# Altium PCB GateDrive.PcbDoc (part 1 of 3)
Units mm, origin at the board's own origin, x right, y up, seen from the top; angles counter-clockwise.
Board outline 204.3 x 103 mm, 4 copper layers (Top Layer, Internal Plane 1, Internal Plane 2, Bottom Layer), stack 0.778 mm thick; 236 components, 133 nets, 651 pads, 165 vias.
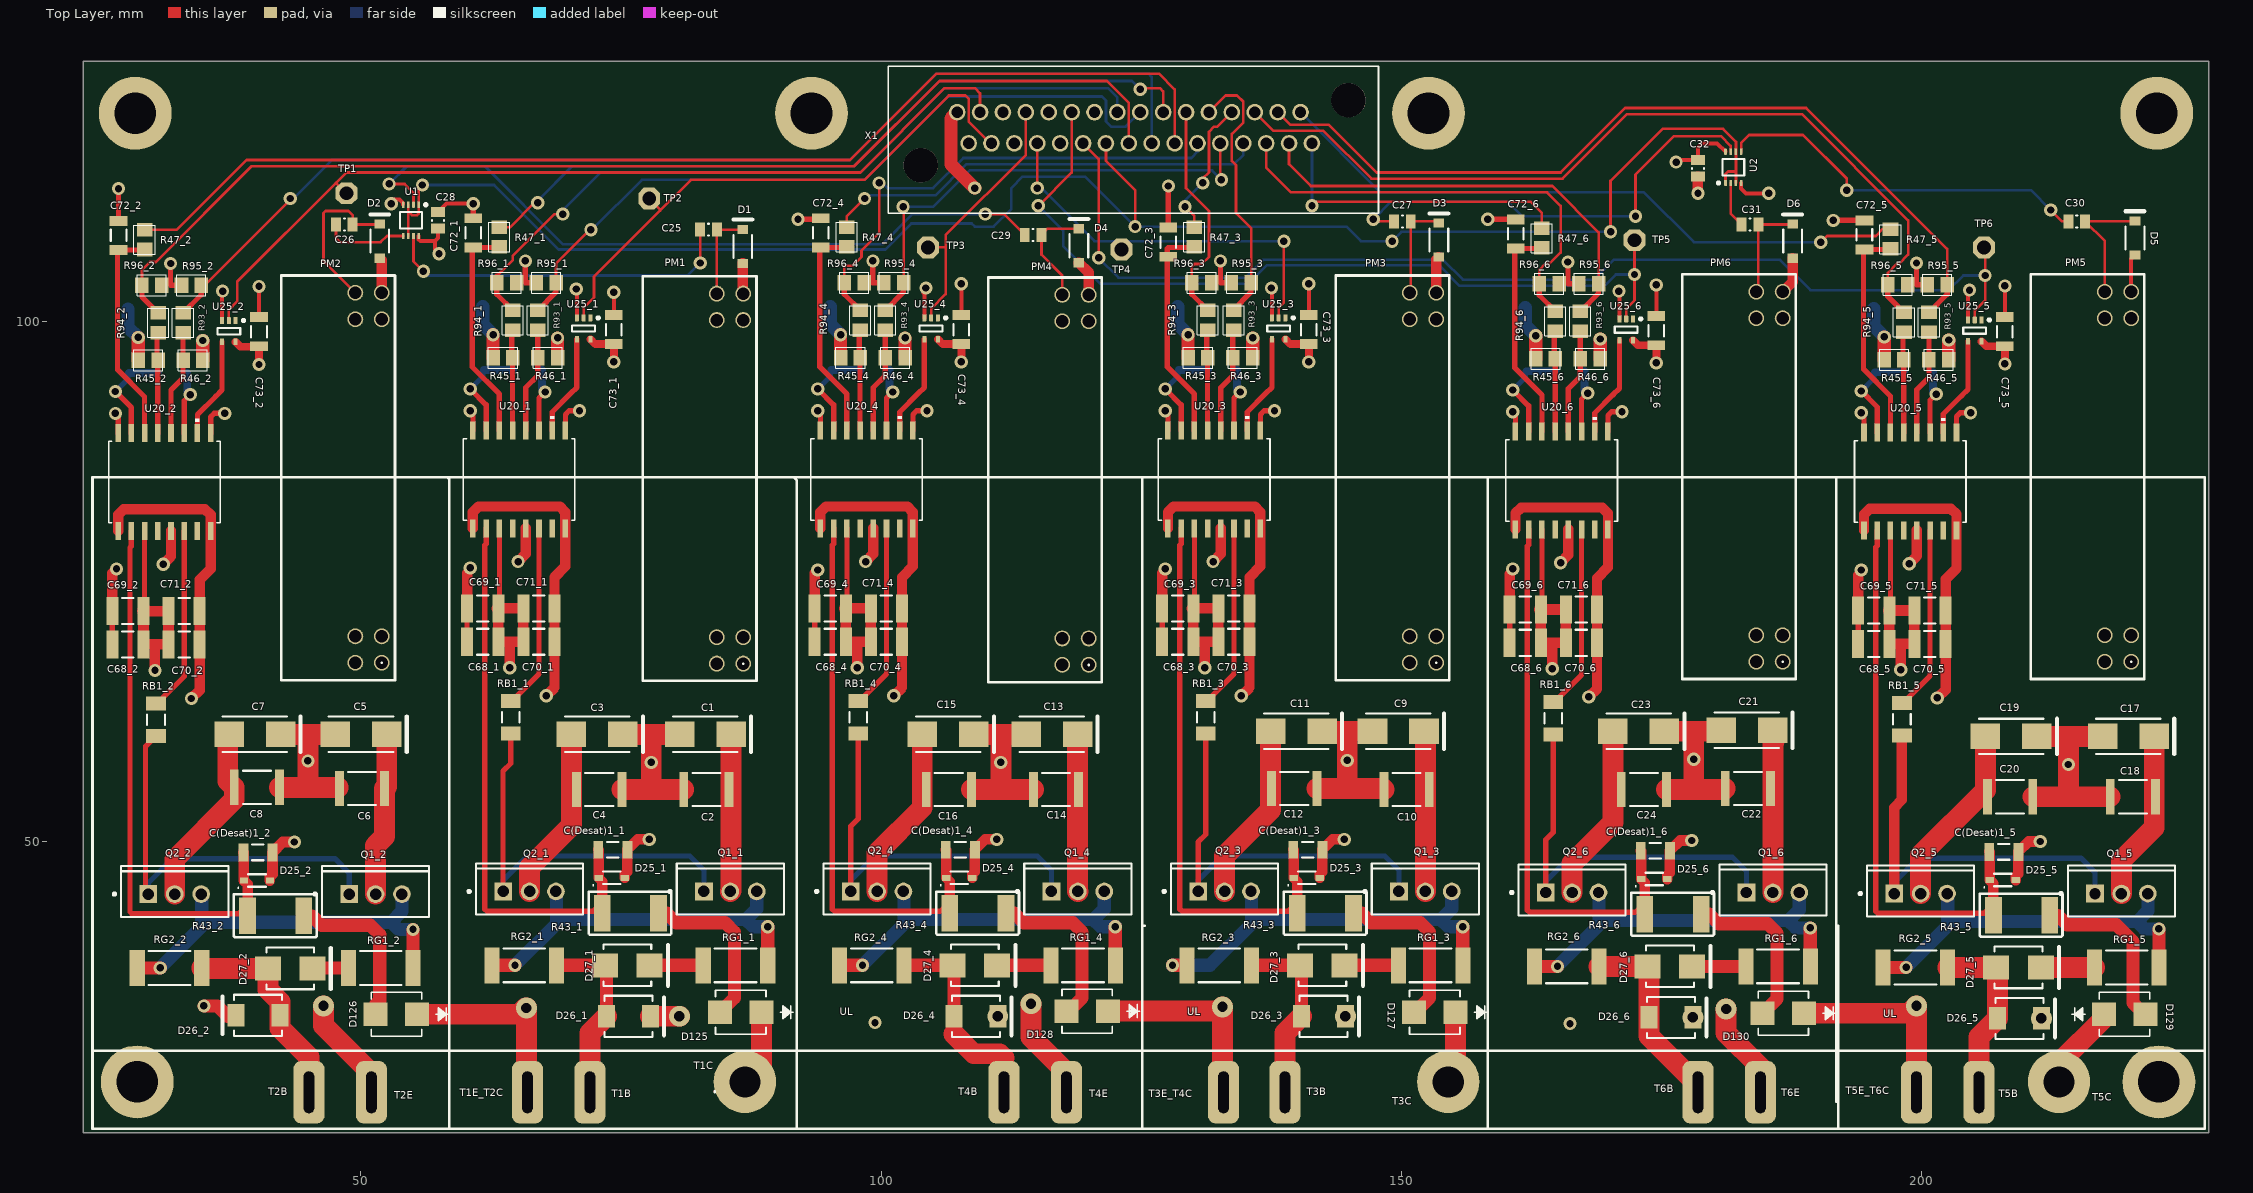
[diagram p0: Top Layer view]
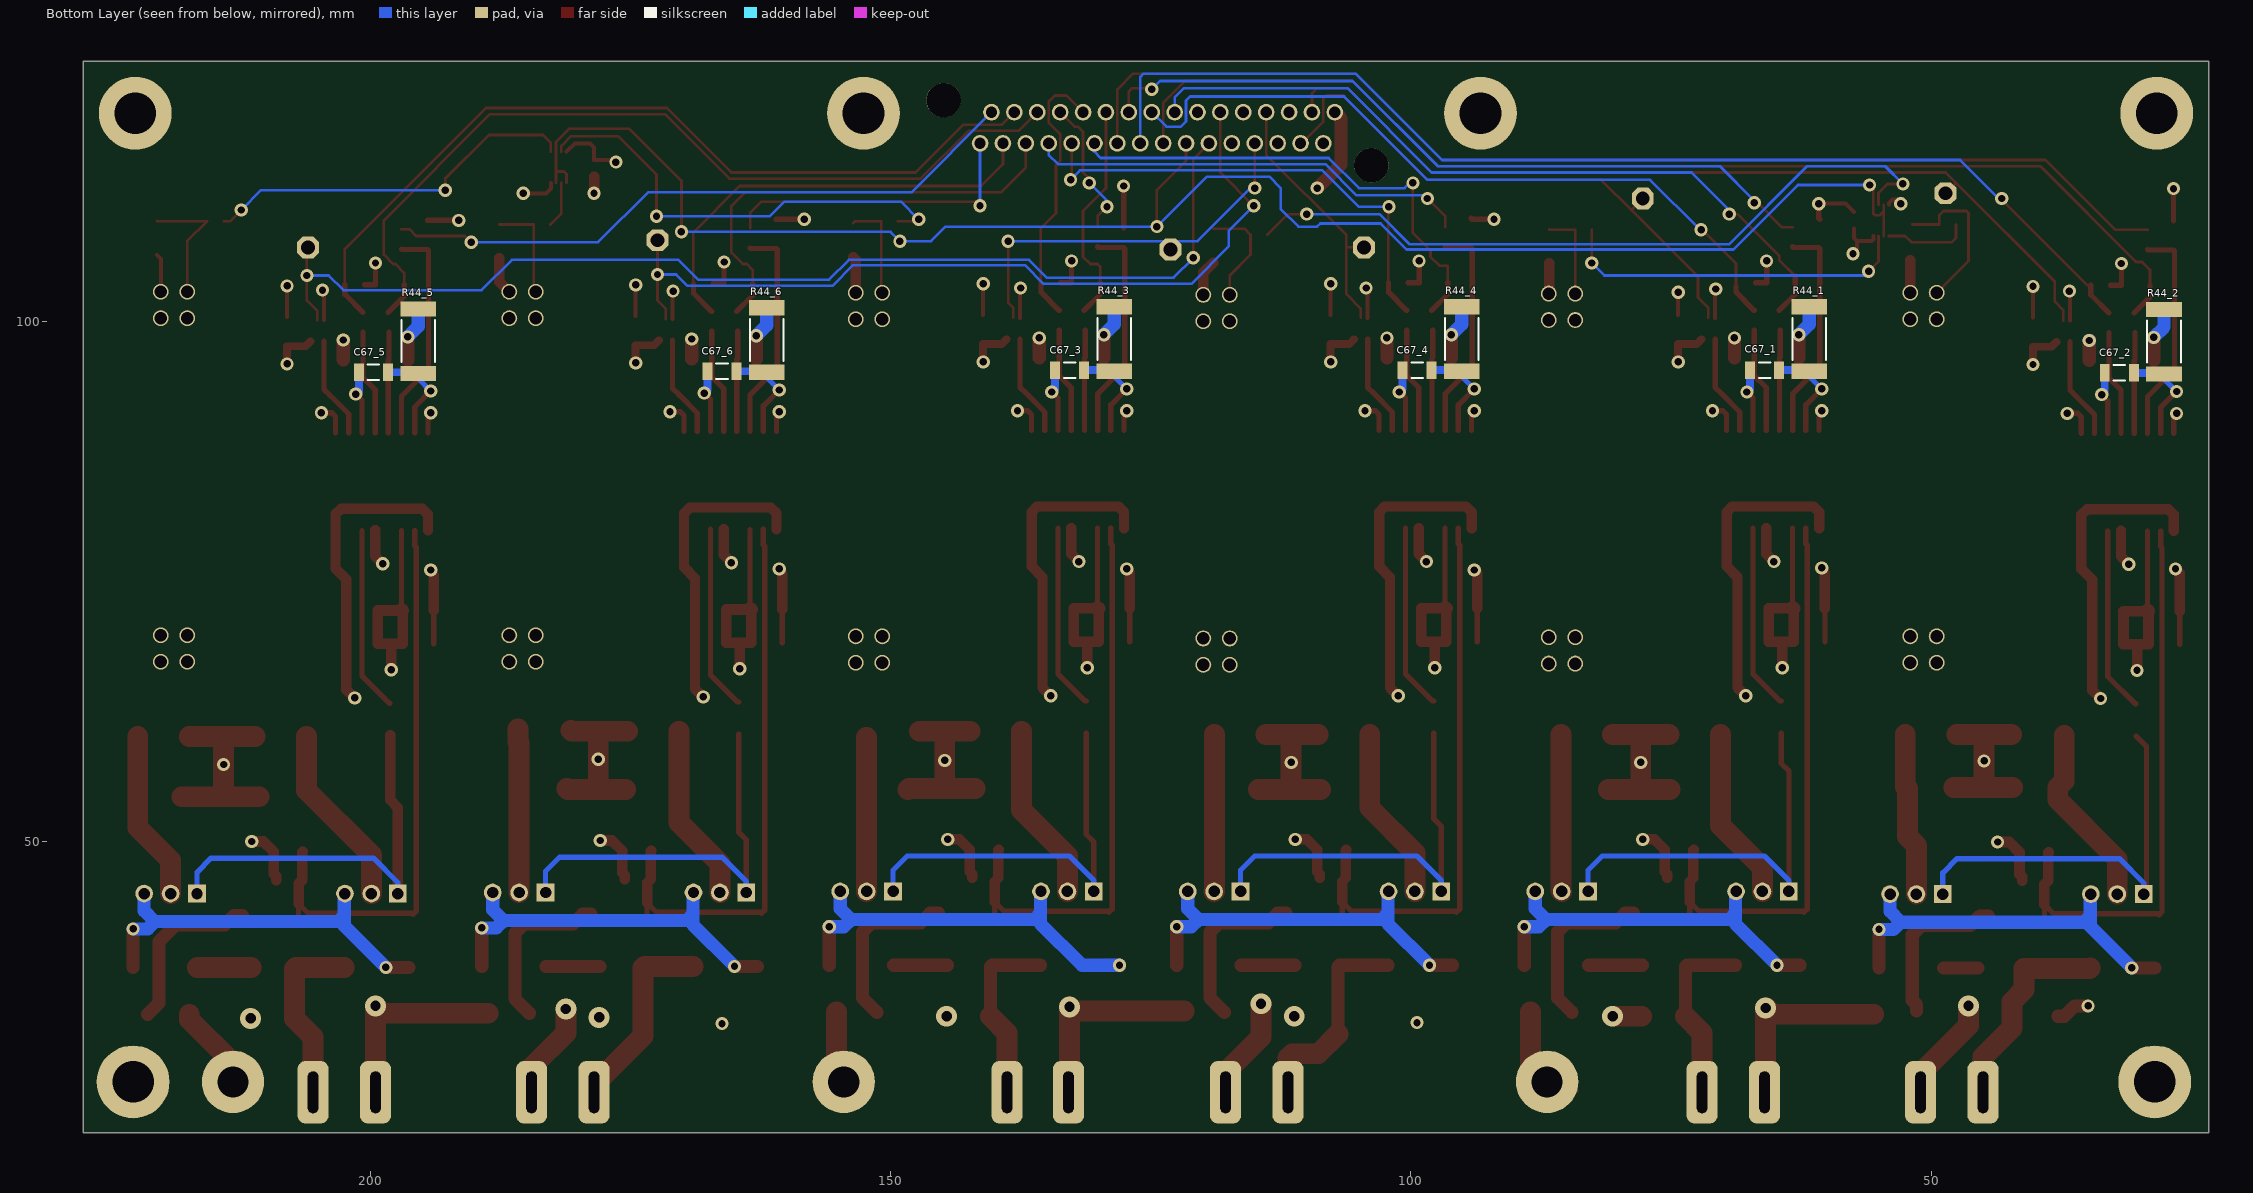
[diagram p1: Bottom Layer view, seen from below]
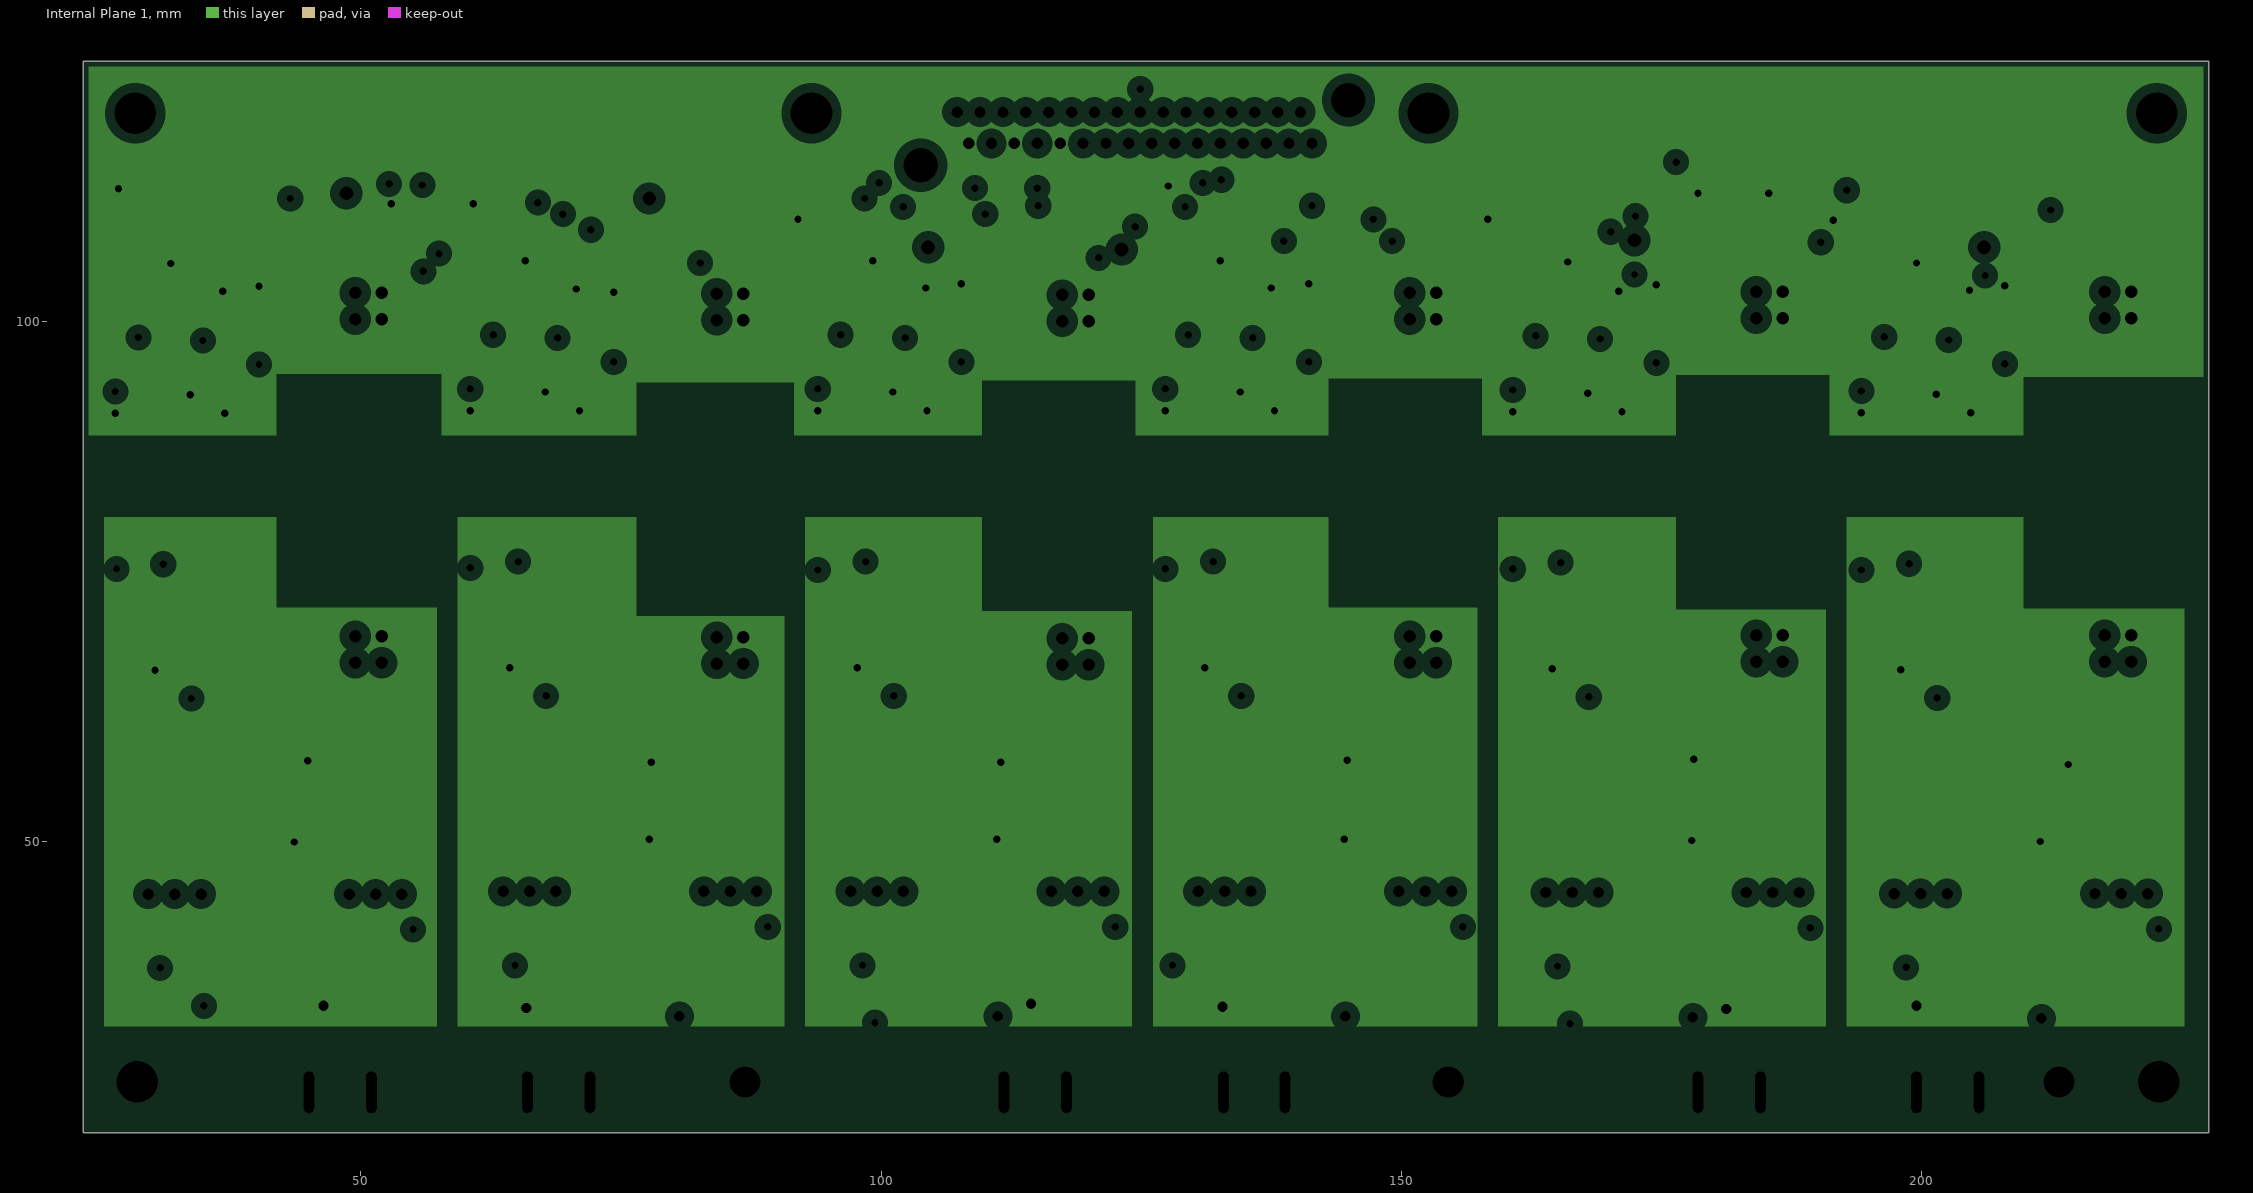
[diagram p2: Internal Plane 1, clearances drawn from the general rule]
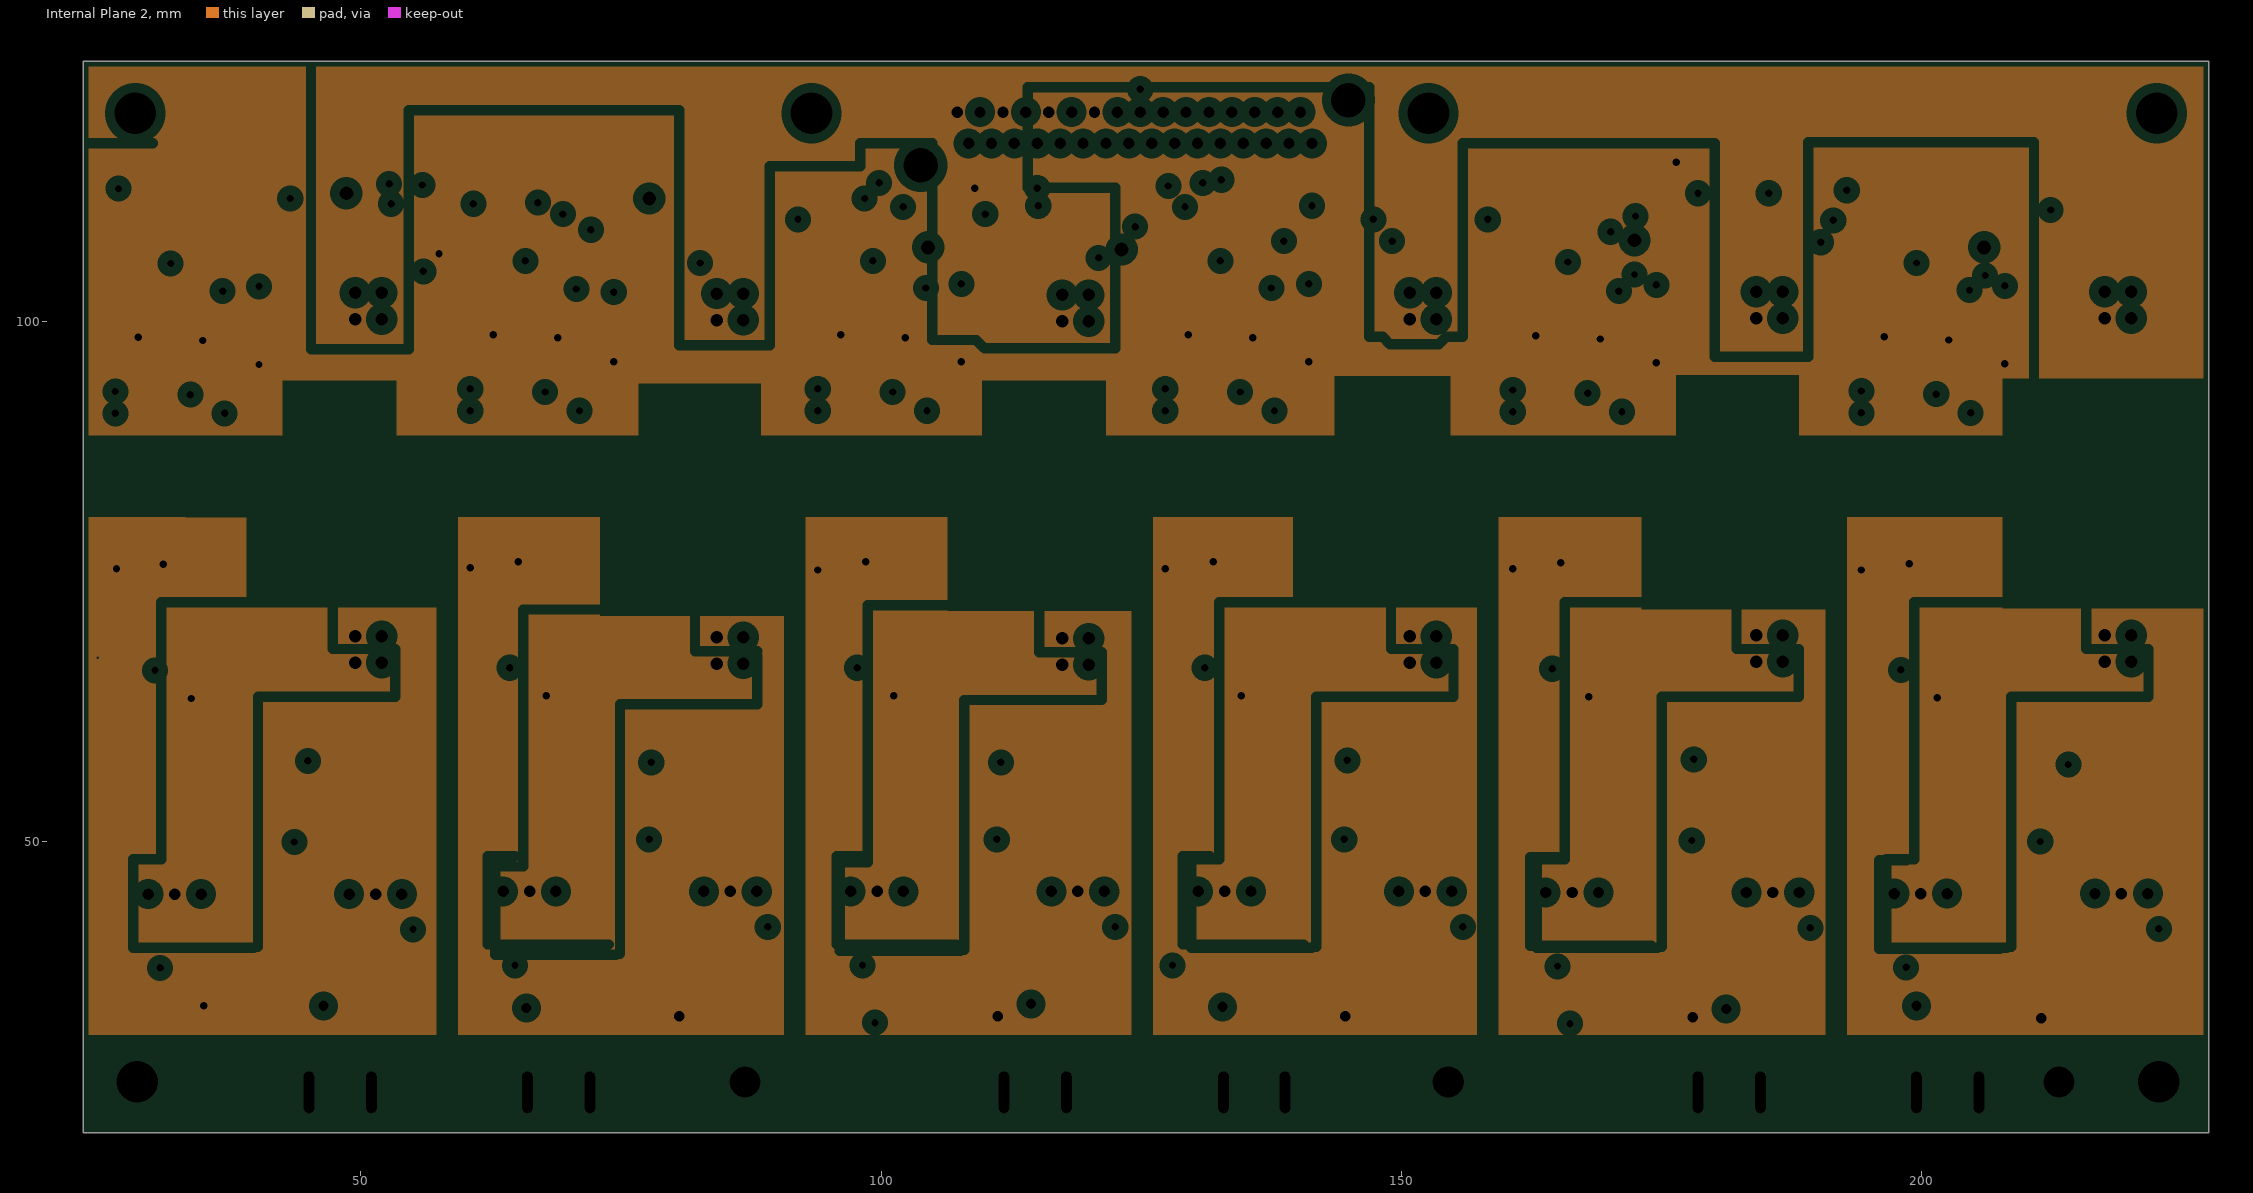
[diagram p3: Internal Plane 2, clearances drawn from the general rule]

## Layer stack, top to bottom
Top Solder: solder mask 0.0102, Solder Resist, Dk 3.5
Top Layer: signal copper 0.0356
Dielectric 1: core 0.254, FR-4, Dk 4.2
Internal Plane 1: plane copper 0.036, net (Multiple Nets)
Dielectric 3: prepreg 0.127, Dk 4.2
Internal Plane 2: plane copper 0.036, net (Multiple Nets)
Dielectric 2: core 0.254, Dk 4.2
Bottom Layer: signal copper 0.0356
Bottom Solder: solder mask 0.0102, Solder Resist, Dk 3.5

## Board outline
23.3,125 23.3,22 227.6,22 227.6,125

## Design rules (kind name [scope] priority, off if disabled: settings)
Clearance [All] p1: gap=0.152 ignorepadtopadclearanceinfootprint=FALSE
Height [All] p1: minheight=0 maxheight=40 prefheight=12.7
HoleSize [All] p1: absolutevalues=TRUE maxlimit=5 minlimit=0.381 maxpercent=80.000 minpercent=20.000
MinimumSolderMaskSliver [All] p1 off: minsoldermaskwidth=0.254
NetAntennae [All] p1 off: netantennaetolerance=0
PlaneClearance [All] p1: clearance=0.9
PlaneConnect [All] p1: planeconnectstyle=Relief reliefexpansion=0.508 reliefentries=4 reliefconductorwidth=0.6 reliefairgap=0.35
PolygonConnect [All] p1: connectstyle=Relief reliefconductorwidth=0.254 reliefentries=4 polygonreliefangle="90 Angle" airgapwidth=0.254
RoutingVias [All] p1: holewidth=0.711 width=1.27 viastyle="Through Hole" minholewidth=0.711 minwidth=1.27 maxholewidth=0.711 maxwidth=1.27
SilkToSolderMaskClearance [IsPad] p1 off: minsilkscreentomaskgap=0.254 clearancetoexposedcopper=TRUE
SolderMaskExpansion [All] p1: expansion=0.102
Width [All] p1: maxlimit=2.54 minlimit=0.254 preferedwidth=1.27
23 further rules are at their usual default settings.

## Classes and differential pairs
component class IO: C73_1 C73_2 C73_3 C73_4 C73_5 C73_6 TP1 TP2 TP3 TP4 TP5 TP6 U25_1 U25_2 U25_3 U25_4 U25_5 U25_6 X1 X?
component class "Gate Drivers W Phase": C67_5 C67_6 C68_5 C68_6 C69_5 C69_6 C70_5 C70_6 C71_5 C71_6 C72_5 C72_6 C(Desat)1_5 C(Desat)1_6 CR1_5 CR1_6 D25_5 D25_6 D26_5 D26_6 D27_5 D27_6 D129 D130 Q1_5 Q1_6 Q2_5 Q2_6 R43_5 R43_6 R44_5 R44_6 R45_5 R45_6 R46_5 R46_6 R47_5 R47_6 R93_5 R93_6 R94_5 R94_6 R95_5 R95_6 R96_5 R96_6 RB1_5 RB1_6 RG1_5 RG1_6 RG2_5 RG2_6 T5B T5C T5E_T6C T6B T6E U20_5 U20_6
component class "Gate Drivers V Phase": C67_3 C67_4 C68_3 C68_4 C69_3 C69_4 C70_3 C70_4 C71_3 C71_4 C72_3 C72_4 C(Desat)1_3 C(Desat)1_4 CR1_3 CR1_4 D25_3 D25_4 D26_3 D26_4 D27_3 D27_4 D127 D128 Q1_3 Q1_4 Q2_3 Q2_4 R43_3 R43_4 R44_3 R44_4 R45_3 R45_4 R46_3 R46_4 R47_3 R47_4 R93_3 R93_4 R94_3 R94_4 R95_3 R95_4 R96_3 R96_4 RB1_3 RB1_4 RG1_3 RG1_4 RG2_3 RG2_4 T3B T3C T3E_T4C T4B T4E U20_3 U20_4
component class "Gate Drivers U Phase": C67_1 C67_2 C68_1 C68_2 C69_1 C69_2 C70_1 C70_2 C71_1 C71_2 C72_1 C72_2 C(Desat)1_1 C(Desat)1_2 CR1_1 CR1_2 D25_1 D25_2 D26_1 D26_2 D27_1 D27_2 D125 D126 Q1_1 Q1_2 Q2_1 Q2_2 R43_1 R43_2 R44_1 R44_2 R45_1 R45_2 R46_1 R46_2 R47_1 R47_2 R93_1 R93_2 R94_1 R94_2 R95_1 R95_2 R96_1 R96_2 RB1_1 RB1_2 RG1_1 RG1_2 RG2_1 RG2_2 T1B T1C T1E_T2C T2B T2E U20_1 U20_2
component class "Gatedrive Power2": C13 C14 C15 C16 C17 C18 C19 C20 C21 C22 C23 C24 C29 C30 C31 C32 C34 C35 C36 C37 C38 C39 C40 C41 C42 C43 C44 C45 C46 C47 C48 C49 C50 C51 C52 C53 C54 C55 C56 C57 C58 C59 C60 C61 C62 C63 C64 C65 C66 D4 D5 D6 D13 D14 D15 D16 D17 D18 D19 D20 D21 D22 D23 D24 L7 L8 L9 L10 L11 L12 PM4 PM5 PM6 R22 R23 R24 R25 R26 R27 R28 R29 R30 R31 R32 R33 R34 R35 R36 R37 R38 R39 R40 R41 R42 T4 T5 T6 U10 U11 U12 U13 U14 U15 U16 U17 U18
component class "Gatedrive Power1": C1 C2 C3 C4 C5 C6 C7 C8 C9 C10 C11 C12 C25 C26 C27 C28 C33 D1 D2 D3 D7 D8 D9 D10 D11 D12 L3 L4 L5 L6 PM1 PM2 PM3 R8 R9 R10 R11 R12 R13 R14 R15 R16 R17 R18 R19 R20 R21 T2 T3 U1 U2 U4 U5 U6 U7 U8 U9

## Components (designator, comment, footprint, x,y, rotation, side; value= is the part's Value field where it differs from the comment)
C1 "TAJC107K016RNJ" AVX-TAJ-C-2_M 83.1,60.3 r180 top
C2 "10uF 16V" CAPC4532X270X30LL40 83.2,55 r0 top
C3 "TAJC107K016RNJ" AVX-TAJ-C-2_M 72.7,60.3 r180 top
C4 "10uF 16V" CAPC4532X270X30LL40 72.9,55 r0 top
C5 "TAJC107K016RNJ" AVX-TAJ-C-2_M 50,60.3 r180 top
C6 "10uF 16V" CAPC4532X270X30LL40 50.1,55.1 r0 top
C7 "TAJC107K016RNJ" AVX-TAJ-C-2_M 39.8,60.3 r180 top
C8 "10uF 16V" CAPC4532X270X30LL40 40,55.2 r0 top
C9 "TAJC107K016RNJ" AVX-TAJ-C-2_M 149.7,60.6 r180 top
C10 "10uF 16V" CAPC4532X270X30LL40 150.5,55 r0 top
C11 "TAJC107K016RNJ" AVX-TAJ-C-2_M 139.9,60.6 r180 top
C12 "10uF 16V" CAPC4532X270X30LL40 139.7,55.1 r0 top
C13 "TAJC107K016RNJ" AVX-TAJ-C-2_M 116.4,60.3 r180 top
C14 "10uF 16V" CAPC4532X270X30LL40 116.8,55 r0 top
C15 "TAJC107K016RNJ" AVX-TAJ-C-2_M 106.425,60.3 r180 top
C16 "10uF 16V" CAPC4532X270X30LL40 106.5,55 r0 top
C17 "TAJC107K016RNJ" AVX-TAJ-C-2_M 219.875,60.1 r180 top
C18 "10uF 16V" CAPC4532X270X30LL40 220.3,54.3 r0 top
C19 "TAJC107K016RNJ" AVX-TAJ-C-2_M 208.6,60.1 r180 top
C20 "10uF 16V" CAPC4532X270X30LL40 208.5,54.3 r0 top
C21 "TAJC107K016RNJ" AVX-TAJ-C-2_M 183.2,60.7 r180 top
C22 "10uF 16V" CAPC4532X270X30LL40 183.3,55.1 r0 top
C23 "TAJC107K016RNJ" AVX-TAJ-C-2_M 172.8,60.6 r180 top
C24 "10uF 16V" CAPC4532X270X30LL40 173.3,55 r0 top
C25 "CAP 100nF 25V 0805(2012)" CAPC0805(2012)75_L 83.4,108.8 r0 top value=100nF
C26 "CAP 100nF 25V 0805(2012)" CAPC0805(2012)75_L 48.4,109.3 r0 top value=100nF
C27 "CAP 100nF 25V 0805(2012)" CAPC0805(2012)75_L 150.1,109.6 r0 top value=100nF
C28 "CAP 100nF 25V 0805(2012)" CAPC0805(2012)75_L 57.4,109.7 r90 top value=100nF
C29 "CAP 100nF 25V 0805(2012)" CAPC0805(2012)75_L 114.6,108.3 r0 top value=100nF
C30 "CAP 100nF 25V 0805(2012)" CAPC0805(2012)75_L 214.9,109.6 r0 top value=100nF
C31 "CAP 100nF 25V 0805(2012)" CAPC0805(2012)75_L 183.5,109.3 r0 top value=100nF
C32 "CAP 100nF 25V 0805(2012)" CAPC0805(2012)75_L 178.5,114.7 r270 top value=100nF
C67_1 "100nF" CAPC1206(3216)75_L 66,95.3 r180 bottom
C67_2 "100nF" CAPC1206(3216)75_L 31.9,95.05 r180 bottom
C67_3 "100nF" CAPC1206(3216)75_L 132.8,95.3 r180 bottom
C67_4 "100nF" CAPC1206(3216)75_L 99.4,95.3 r180 bottom
C67_5 "100nF" CAPC1206(3216)75_L 199.7,95.1 r180 bottom
C67_6 "100nF" CAPC1206(3216)75_L 166.2,95.2 r180 bottom
C68_1 "1uF" CAPC1210(3225)170_N 61.7,69.2 r180 top
C68_2 "1uF" CAPC1210(3225)170_N 27.6,68.95 r180 top
C68_3 "1uF" CAPC1210(3225)170_N 128.5,69.2 r180 top
C68_4 "1uF" CAPC1210(3225)170_N 95.1,69.2 r180 top
C68_5 "1uF" CAPC1210(3225)170_N 195.4,69 r180 top
C68_6 "1uF" CAPC1210(3225)170_N 161.9,69.1 r180 top
C69_1 "1uF" CAPC1210(3225)170_N 61.7,72.4 r180 top
C69_2 "1uF" CAPC1210(3225)170_N 27.6,72.15 r180 top
C69_3 "1uF" CAPC1210(3225)170_N 128.5,72.4 r180 top
C69_4 "1uF" CAPC1210(3225)170_N 95.1,72.4 r180 top
C69_5 "1uF" CAPC1210(3225)170_N 195.4,72.2 r180 top
C69_6 "1uF" CAPC1210(3225)170_N 161.9,72.3 r180 top
C70_1 "1uF" CAPC1210(3225)170_N 67.1,69.2 r180 top
C70_2 "1uF" CAPC1210(3225)170_N 33,68.95 r180 top
C70_3 "1uF" CAPC1210(3225)170_N 133.9,69.2 r180 top
C70_4 "1uF" CAPC1210(3225)170_N 100.5,69.2 r180 top
C70_5 "1uF" CAPC1210(3225)170_N 200.8,69 r180 top
C70_6 "1uF" CAPC1210(3225)170_N 167.3,69.1 r180 top
C71_1 "1uF" CAPC1210(3225)170_N 67.1,72.4 r180 top
C71_2 "1uF" CAPC1210(3225)170_N 33,72.15 r180 top
C71_3 "1uF" CAPC1210(3225)170_N 133.9,72.4 r180 top
C71_4 "1uF" CAPC1210(3225)170_N 100.5,72.4 r180 top
C71_5 "1uF" CAPC1210(3225)170_N 200.8,72.2 r180 top
C71_6 "1uF" CAPC1210(3225)170_N 167.3,72.3 r180 top
C72_1 "100pF" CAPC1206(3216)75_L 60.8,108.5 r270 top
C72_2 "100pF" CAPC1206(3216)75_L 26.7,108.25 r270 top
C72_3 "100pF" CAPC1206(3216)75_L 127.6,107.6 r270 top
C72_4 "100pF" CAPC1206(3216)75_L 94.2,108.5 r270 top
C72_5 "100pF" CAPC1206(3216)75_L 194.5,108.3 r270 top
C72_6 "100pF" CAPC1206(3216)75_L 161,108.4 r270 top
C73_1 "100nF" CAPC1206(3216)75_L 74.3,99.2 r90 top
C73_2 "100nF" CAPC1206(3216)75_L 40.2,99 r90 top
C73_3 "100nF" CAPC1206(3216)75_L 141.1,99.2 r90 top
C73_4 "100nF" CAPC1206(3216)75_L 107.7,99.2 r90 top
C73_5 "100nF" CAPC1206(3216)75_L 208,99 r90 top
C73_6 "100nF" CAPC1206(3216)75_L 174.5,99.1 r90 top
C(Desat)1_1 "100pF" CAPC1206(3216)75_L 74.2,49.2 r180 top
C(Desat)1_2 "100pF" CAPC1206(3216)75_L 40.1,48.95 r180 top
C(Desat)1_3 "100pF" CAPC1206(3216)75_L 141,49.2 r180 top
C(Desat)1_4 "100pF" CAPC1206(3216)75_L 107.6,49.2 r180 top
C(Desat)1_5 "100pF" CAPC1206(3216)75_L 207.9,49 r180 top
C(Desat)1_6 "100pF" CAPC1206(3216)75_L 174.4,49.1 r180 top
D1 "MBR0540" FAIR-SOD123-2_V 86.7,107.2 r90 top
D2 "MBR0540" FAIR-SOD123-2_V 51.8,107.7 r90 top
D3 "MBR0540" FAIR-SOD123-2_V 153.6,107.8 r90 top
D4 "MBR0540" FAIR-SOD123-2_V 119,107.265 r90 top
D5 "MBR0540" FAIR-SOD123-2_V 220.5,108 r90 top
D6 "MBR0540" FAIR-SOD123-2_V 187.6,107.7 r90 top
D25_1 "BAT165" INF-SOD323_V 74.1,46.5 r90 top
D25_2 "BAT165" INF-SOD323_V 40,46.25 r90 top
D25_3 "BAT165" INF-SOD323_V 140.9,46.5 r90 top
D25_4 "BAT165" INF-SOD323_V 107.5,46.5 r90 top
D25_5 "BAT165" INF-SOD323_V 207.8,46.3 r90 top
D25_6 "BAT165" INF-SOD323_V 174.3,46.4 r90 top
D26_1 "STPS160U" STM-SMB_P_V 75.7,33.2 r0 top
D26_2 "STPS160U" STM-SMB_P_V 40.1,33.3 r180 top
D26_3 "STPS160U" STM-SMB_P_V 142.5,33.2 r0 top
D26_4 "STPS160U" STM-SMB_P_V 109.1,33.2 r0 top
D26_5 "STPS160U" STM-SMB_P_V 209.4,33 r0 top
D26_6 "STPS160U" STM-SMB_P_V 175.9,33.1 r0 top
D27_1 "RS1MB-13-F" DIOD-SMB-2_V 75.6,38.1 r0 top
D27_2 "RS1MB-13-F" DIOD-SMB-2_V 43.2,37.8 r0 top
D27_3 "RS1MB-13-F" DIOD-SMB-2_V 142.4,38.1 r0 top
D27_4 "RS1MB-13-F" DIOD-SMB-2_V 109,38.1 r0 top
D27_5 "RS1MB-13-F" DIOD-SMB-2_V 209.3,37.9 r0 top
D27_6 "RS1MB-13-F" DIOD-SMB-2_V 175.8,38 r0 top
D125 "Part Number: STTH112U" SMB 86.5,33.6 r180 top value=Value
D126 "Part Number: STTH112U" SMB 53.4,33.4 r180 top value=Value
D127 "Part Number: STTH112U" SMB 153.2,33.6 r180 top value=Value
D128 "Part Number: STTH112U" SMB 119.8,33.7 r180 top value=Value
D129 "Part Number: STTH112U" SMB 219.5,33.4 r0 top value=Value
D130 "Part Number: STTH112U" SMB 186.7,33.5 r180 top value=Value
PM1 "MGJ6D121510SC" MGJ6D121510SC 88.01,65.436 r90 top
PM2 "MGJ6D121510SC" MGJ6D121510SC 53.27,65.516 r90 top
PM3 "MGJ6D121510SC" MGJ6D121510SC 154.61,65.516 r90 top
PM4 "MGJ6D121510SC" MGJ6D121510SC 121.21,65.316 r90 top
PM5 "MGJ6D121510SC" MGJ6D121510SC 221.41,65.616 r90 top
PM6 "MGJ6D121510SC" MGJ6D121510SC 187.91,65.616 r90 top
Q1_1 "MJE15030" ONSC-TO-220-3-221A-09 85.5,45.2 r90 top
Q1_2 "MJE15030" ONSC-TO-220-3-221A-09 51.4,44.95 r90 top
Q1_3 "MJE15030" ONSC-TO-220-3-221A-09 152.3,45.2 r90 top
Q1_4 "MJE15030" ONSC-TO-220-3-221A-09 118.9,45.2 r90 top
Q1_5 "MJE15030" ONSC-TO-220-3-221A-09 219.2,45 r90 top
Q1_6 "MJE15030" ONSC-TO-220-3-221A-09 185.7,45.1 r90 top
Q2_1 "MJE15031" ONSC-TO-220-3-221A-09 66.2,45.2 r90 top
Q2_2 "MJE15031" ONSC-TO-220-3-221A-09 32.1,44.95 r90 top
Q2_3 "MJE15031" ONSC-TO-220-3-221A-09 133,45.2 r90 top
Q2_4 "MJE15031" ONSC-TO-220-3-221A-09 99.6,45.2 r90 top
Q2_5 "MJE15031" ONSC-TO-220-3-221A-09 199.9,45 r90 top
Q2_6 "MJE15031" ONSC-TO-220-3-221A-09 166.4,45.1 r90 top
R43_1 "1K 5% 2512(6432)" 2512 75.9,43.1 r0 top value="1000.00 Ohm"
R43_2 "1K 5% 2512(6432)" 2512 41.8,42.85 r0 top value="1000.00 Ohm"
R43_3 "1K 5% 2512(6432)" 2512 142.7,43.1 r0 top value="1000.00 Ohm"
R43_4 "1K 5% 2512(6432)" 2512 109.3,43.1 r0 top value="1000.00 Ohm"
R43_5 "1K 5% 2512(6432)" 2512 209.6,42.9 r0 top value="1000.00 Ohm"
R43_6 "1K 5% 2512(6432)" 2512 176.1,43 r0 top value="1000.00 Ohm"
R44_1 "10R 5% 2512(6432)" RESC2512(6432)_M 61.7,98.3 r270 bottom value="2.20 Ohm"
R44_2 "10R 5% 2512(6432)" RESC2512(6432)_M 27.6,98.05 r270 bottom value="2.20 Ohm"
R44_3 "10R 5% 2512(6432)" RESC2512(6432)_M 128.5,98.3 r270 bottom value="2.20 Ohm"
R44_4 "10R 5% 2512(6432)" RESC2512(6432)_M 95.1,98.3 r270 bottom value="2.20 Ohm"
R44_5 "10R 5% 2512(6432)" RESC2512(6432)_M 195.4,98.1 r270 bottom value="2.20 Ohm"
R44_6 "10R 5% 2512(6432)" RESC2512(6432)_M 161.9,98.2 r270 bottom value="2.20 Ohm"
R45_1 "4k7" R0805 63.65,96.5 r180 top
R45_2 "4k7" R0805 29.55,96.25 r180 top
R45_3 "4k7" R0805 130.45,96.5 r180 top
R45_4 "4k7" R0805 97.05,96.5 r180 top
R45_5 "4k7" R0805 197.35,96.3 r180 top
R45_6 "4k7" R0805 163.85,96.4 r180 top
R46_1 "4k7" R0805 67.95,96.5 r0 top
R46_2 "4k7" R0805 33.85,96.25 r0 top
R46_3 "4k7" R0805 134.75,96.5 r0 top
R46_4 "4k7" R0805 101.35,96.5 r0 top
R46_5 "4k7" R0805 201.65,96.3 r0 top
R46_6 "4k7" R0805 168.15,96.4 r0 top
R47_1 "100R" R0805 63.3,108.1 r90 top
R47_2 "100R" R0805 29.2,107.85 r90 top
R47_3 "100R" R0805 130.1,108.1 r90 top
R47_4 "100R" R0805 96.7,108.1 r90 top
R47_5 "100R" R0805 197,107.9 r90 top
R47_6 "100R" R0805 163.5,108 r90 top
R93_1 "15k" R0805 67,100.1 r90 top
R93_2 "15k" R0805 32.9,99.85 r90 top
R93_3 "15k" R0805 133.9,100.1 r90 top
R93_4 "15k" R0805 100.4,100.1 r90 top
R93_5 "15k" R0805 200.7,99.9 r90 top
R93_6 "15k" R0805 167.2,100 r90 top
R94_1 "15k" R0805 64.6,100.1 r90 top
R94_2 "15k" R0805 30.5,99.85 r90 top
R94_3 "15k" R0805 131.4,100.1 r90 top
R94_4 "15k" R0805 98,100.1 r90 top
R94_5 "15k" R0805 198.3,99.9 r90 top
R94_6 "15k" R0805 164.8,100 r90 top
R95_1 "22k" R0805 67.8,103.7 r180 top
R95_2 "22k" R0805 33.7,103.45 r180 top
R95_3 "22k" R0805 134.6,103.7 r180 top
R95_4 "22k" R0805 101.2,103.7 r180 top
R95_5 "22k" R0805 201.5,103.5 r180 top
R95_6 "22k" R0805 168,103.6 r180 top
R96_1 "22k" R0805 64,103.7 r0 top
R96_2 "22k" R0805 29.9,103.45 r0 top
R96_3 "22k" R0805 130.8,103.7 r0 top
R96_4 "22k" R0805 97.4,103.7 r0 top
R96_5 "22k" R0805 197.7,103.5 r0 top
R96_6 "22k" R0805 164.2,103.6 r0 top
RB1_1 "47.00 Ohm" RESC1206(3216)_M 64.4,61.95 r270 top
RB1_2 "47.00 Ohm" RESC1206(3216)_M 30.3,61.7 r270 top
RB1_3 "47.00 Ohm" RESC1206(3216)_M 131.2,61.95 r270 top
RB1_4 "47.00 Ohm" RESC1206(3216)_M 97.8,61.95 r270 top
RB1_5 "47.00 Ohm" RESC1206(3216)_M 198.1,61.75 r270 top
RB1_6 "47.00 Ohm" RESC1206(3216)_M 164.6,61.85 r270 top
RG1_1 "10R 5% 2512(6432)" RESC2512(6432)_M 86,38.1 r180 top value="2.20 Ohm"
RG1_2 "10R 5% 2512(6432)" RESC2512(6432)_M 51.9,37.85 r180 top value="2.20 Ohm"
RG1_3 "10R 5% 2512(6432)" RESC2512(6432)_M 152.8,38.1 r180 top value="2.20 Ohm"
RG1_4 "10R 5% 2512(6432)" RESC2512(6432)_M 119.4,38.1 r180 top value="2.20 Ohm"
RG1_5 "10R 5% 2512(6432)" RESC2512(6432)_M 219.7,37.9 r180 top value="2.20 Ohm"
RG1_6 "10R 5% 2512(6432)" RESC2512(6432)_M 186.2,38 r180 top value="2.20 Ohm"
RG2_1 "2R2 5% 2512(6432)" RESC2512(6432)_M 65.7,38.1 r0 top value="2.20 Ohm"
RG2_2 "2R2 5% 2512(6432)" RESC2512(6432)_M 31.6,37.85 r0 top value="2.20 Ohm"
RG2_3 "2R2 5% 2512(6432)" RESC2512(6432)_M 132.5,38.1 r0 top value="2.20 Ohm"
RG2_4 "2R2 5% 2512(6432)" RESC2512(6432)_M 99.1,38.1 r0 top value="2.20 Ohm"
RG2_5 "2R2 5% 2512(6432)" RESC2512(6432)_M 199.4,37.9 r0 top value="2.20 Ohm"
RG2_6 "2R2 5% 2512(6432)" RESC2512(6432)_M 165.9,38 r0 top value="2.20 Ohm"
T1B "CON1" TERMINAL 72,25.9 r0 top
T1C "CON1" TERMINAL_POST#1 84.36,26.1 r0 top
T1E_T2C "CON1" TERMINAL 66,25.9 r180 top
T2B "CON1" TERMINAL 45,25.9 r0 top
T2E "CON1" TERMINAL 51,25.9 r0 top
T3B "CON1" TERMINAL 138.8,25.9 r0 top
T3C "CON1" TERMINAL_POST#2 151.96,25.8 r0 top
T3E_T4C "CON1" TERMINAL 132.9,25.9 r0 top
T4B "CON1" TERMINAL 111.8,25.9 r0 top
T4E "CON1" TERMINAL 117.8,25.9 r0 top
T5B "CON1" TERMINAL 205.5,25.9 r0 top
T5C "CON1" TERMINAL_POST#3 210.66,25.9 r0 top
T5E_T6C "CON1" TERMINAL 199.5,25.9 r180 top
T6B "CON1" TERMINAL 178.5,25.9 r0 top
T6E "CON1" TERMINAL 184.5,25.9 r0 top
TP1 "PTR1PAD1-13" P1-13 48.6,112.3 r0 top
TP2 "PTR1PAD1-13" P1-13 77.7,111.8 r0 top
TP3 "PTR1PAD1-13" P1-13 104.5,107.1 r0 top
TP4 "PTR1PAD1-13" P1-13 123.1,106.9 r0 top
TP5 "PTR1PAD1-13" P1-13 172.4,107.8 r0 top
TP6 "PTR1PAD1-13" P1-13 206,107.1 r0 top
U1 "SN74AUP3G34DCURG4" DCU0008A_L 54.8,109.7 r270 top
U2 "SN74AUP3G34DCURG4" DCU0008A_L 181.9,114.8 r90 top
U20_1 "Part Number: 1ED020I12B2XUMA1" PG-DSO-16-15 65.205,84.801 r90 top value=Value
U20_2 "Part Number: 1ED020I12B2XUMA1" PG-DSO-16-15 31.105,84.551 r90 top value=Value
U20_3 "Part Number: 1ED020I12B2XUMA1" PG-DSO-16-15 132.005,84.801 r90 top value=Value
U20_4 "Part Number: 1ED020I12B2XUMA1" PG-DSO-16-15 98.605,84.801 r90 top value=Value
U20_5 "Part Number: 1ED020I12B2XUMA1" PG-DSO-16-15 198.905,84.601 r90 top value=Value
U20_6 "Part Number: 1ED020I12B2XUMA1" PG-DSO-16-15 165.405,84.701 r90 top value=Value
U25_1 "SN74LV1T34DCKR" DCK0005A_L 71.4,99.3 r270 top
U25_2 "SN74LV1T34DCKR" DCK0005A_L 37.3,99.05 r270 top
U25_3 "SN74LV1T34DCKR" DCK0005A_L 138.2,99.3 r270 top
U25_4 "SN74LV1T34DCKR" DCK0005A_L 104.8,99.3 r270 top
U25_5 "SN74LV1T34DCKR" DCK0005A_L 205.1,99.1 r270 top
U25_6 "SN74LV1T34DCKR" DCK0005A_L 171.6,99.2 r270 top
X1 "MX34032UF1" CONN_MX34032UF1 107.3,120.1 r0 top

## Footprints (in the part's own frame and the unit in brackets; to place one, negate y for a bottom-side part, rotate by r counter-clockwise, add the part's x,y. Pads: shape width x height; smd on the part's side, far side on the other; paste and mask are expansions set on the pad)
2512 [mm]
  rect 1.6x3.5 smd: 1(-2.7,0) 2(2.7,0)
  silkscreen extent -4.01,-2.06 3.94,2.08
AVX-TAJ-C-2_M [mm] "Molded Capacitor, 2-Leads, Body 6.2x3.4mm, IPC Low Density"
  rect 2.85x2.45 smd: 1(-2.475,0) 2(2.475,0)
  silkscreen extent -4.4,-1.7 3.1,1.7, body extent -3.32,-1.7 3.32,1.7, height 2.8
CAPC0805(2012)75_L [mm] "Chip Capacitor, Body 2.0x1.2mm, Height 0.75mm, IPC High Density"
  rect 0.95x1.35 smd: 1(-0.8,0) 2(0.8,0)
  silkscreen extent -0.05,-0.58 0.05,0.58, body extent -1.1,-0.72 1.1,0.72, height 0.75
CAPC1206(3216)75_L [mm] "Chip Capacitor, Body 3.2x1.6mm, Height 0.75mm, IPC High Density"
  rect 0.95x1.7 smd: 1(-1.4,0) 2(1.4,0)
  silkscreen extent -0.55,-0.75 0.55,0.75, body extent -1.7,-0.9 1.7,0.9, height 0.75
CAPC1210(3225)170_N [mm] "Chip Capacitor, Body 3.2x2.5mm, Height 1.7mm, IPC Medium Density"
  rect 1.15x2.7 smd: 1(-1.5,0) 2(1.5,0)
  silkscreen extent -0.55,-1.25 0.55,1.25, body extent -1.7,-1.35 1.7,1.35, height 1.7
CAPC4532X270X30LL40 [mm] "Chip Capacitor, 2-Leads, Body 4.90x3.50mm, IPC High Density"
  rect 0.85x3.4 smd: 1(-2.175,0) 2(2.175,0)
  silkscreen extent -1.35,-1.6 1.35,1.6, body extent -2.45,-1.75 2.45,1.75, height 2.7
CONN_MX34032UF1 [mil]
  round 63 hole 43 mask+0: 1(0,0) 2(43.31,-118.11) 3(86.61,0) 4(129.92,-118.11) 5(173.23,0) 6(216.54,-118.11) 7(259.84,0) 8(303.15,-118.11) 9(346.46,0) 10(389.76,-118.11) 11(433.07,0) 12(476.38,-118.11) 13(519.69,0) 14(562.99,-118.11) 15(606.3,-0.16) 16(649.61,-118.11) 17(692.91,0) 18(736.22,-118.11) 19(779.53,0) 20(822.83,-118.11) 21(866.14,0) 22(909.45,-118.11) 23(952.76,0) 24(996.06,-118.11) 25(1039.37,0) 26(1082.68,-118.11) 27(1125.98,0) 28(1169.29,-118.11) 29(1212.6,0) 30(1255.91,-118.11) 31(1299.21,0) 32(1342.52,-118.11)
  round 130 hole 130: 33(-137.72,-200.94) 34(1480.32,45.28)
  silkscreen extent -261,-383 1594,174
DCK0005A_L [mm] "SOT23, 5-Leads, Body 2.15x1.4mm, Pitch 0.65mm, IPC High Density"
  rrect25% 0.65x0.4 smd: 1(-1.025,0.65) 2(-1.025,0) 3(-1.025,-0.65) 4(1.025,-0.65) 5(1.025,0.65)
  silkscreen extent -1.15,-1.1 0.3,1.53, body extent -1.14,-1 1.14,1, height 0.94
DCU0008A_L [mm] "SOP, 8-Leads, Body 2.4x2.1mm, Pitch 0.5mm, IPC High Density"
  rrect40% 0.6x0.25 smd: 1(-1.5,0.75) 2(-1.5,0.25) 3(-1.5,-0.25) 4(-1.5,-0.75) 5(1.5,-0.75) 6(1.5,-0.25) 7(1.5,0.25) 8(1.5,0.75)
  silkscreen extent -1.62,-1.05 0.8,1.55, body extent -1.56,-1 1.56,1, height 0.9
DIOD-SMB-2_V [mm] "Molded Diode, 2-Leads, Body 4.57x3.94mm"
  rect 2.5x2.3 smd: 1(-2.15,0) 2(2.15,0)
  silkscreen extent -2.3,-2 3.9,2, body extent -2.5,-1.97 2.5,1.97, height 2.5
FAIR-SOD123-2_V [mm] "SOD123, 2-Leads, Body 1.80x2.85mm"
  rect 0.88x1.02 smd: 1(-1.635,0) 2(1.635,0)
  silkscreen extent -1.11,-0.9 2.58,0.9, body extent -1.43,-0.9 1.42,0.9, height 1.28
INF-SOD323_V [mm] "SOD, 2-Leads, Body 1.7x1.25 mm"
  rect 0.6x0.8 smd: 1(0,1.25) 2(0,-1.25)
  silkscreen extent -0.76,-0.85 0.6,1.83, body extent -0.63,-0.85 0.63,0.85, height 1.1
MGJ6D121510SC [mil]
  round 60 hole 47.24: 1(1465.5,150) 2(1365.5,150) 3(165.5,150) 4(65.5,150) 5(65.5,50) 6(165.5,50) 7(1365.5,50) 8(1465.5,50)
  silkscreen extent 0,0 1531,430
ONSC-TO-220-3-221A-09 [mm] "FM, 3-Leads, Body 10.3x4.85mm, Pitch 2.54mm"
  rect 1.7x1.7 hole 1.1: 1(0,2.54)
  round 1.7 hole 1.1: 2(0,0) 3(0,-2.54)
  silkscreen extent -2.2,-5.15 2.7,5.92, body extent -2.18,-5.15 2.67,5.15, height 19.85
P1-13 [mil] "P1-13"
  oct 82.3x82.3 hole 52: TP(0,0)
PG-DSO-16-15 [mil]
  rect 68x21 smd paste+0 mask+0: 1(-185,175) 2(-185,125) 3(-185,75) 4(-185,25) 5(-185,-25) 6(-185,-75) 7(-185,-125) 8(-185,-175) 9(185,-175) 10(185,-125) 11(185,-75) 12(185,-25) 13(185,25) 14(185,75) 15(185,125) 16(185,175)
  silkscreen extent -154,-211 239,211, body extent 0,0 10,10, height 10
R0805 [mm] "R0805"
  rect 1.3x1.5 smd: 1(-0.95,0) 2(0.95,0)
  silkscreen extent -1.4,-1.02 1.4,1.02
RESC1206(3216)_M [mm] "Chip Resistor, Body 3.2x1.6mm, IPC Low Density"
  rect 1.35x1.9 smd: 1(-1.55,0) 2(1.55,0)
  silkscreen extent -0.5,-0.85 0.5,0.85, body extent -1.67,-0.87 1.67,0.87, height 0.75
RESC2512(6432)_M [mm] "Chip Resistor, Body 6.4x3.2mm, IPC Low Density"
  rect 1.45x3.45 smd: 1(-3.1,0) 2(3.1,0)
  silkscreen extent -2,-1.63 2,1.63, body extent -3.25,-1.7 3.25,1.7, height 0.75
SMB [mil]
  rect 91x89 smd: 1(-78.5,0) 2(78.5,0)
  silkscreen extent -199,-83 96,83, body extent 0,0 10,10, height 10
STM-SMB_P_V [mm] "SMB, 2-Leads, Body 4.325x3.625mm"
  rect 1.62x2.18 smd: 1(-2.11,0) 2(2.11,0)
  silkscreen extent -2.3,-1.97 3.42,1.97, body extent -2.16,-1.81 2.16,1.81, height 2.59
TERMINAL [mm]
  rrect50% 3x6 hole 1 slot 4 at 90 deg: 1(0,0)
TERMINAL_POST#1 [mm]
  round 6 hole 3: 1(2.54,0.8)
TERMINAL_POST#2 [mm]
  round 6 hole 3: 1(2.54,1.1)
TERMINAL_POST#3 [mm]
  round 6 hole 3: 1(2.54,1)

## Part data
C1 C3 C5 C7 C9 C11 C13 C15 C17 C19 C21 C23: library part CMP-2100-03691-1, "Standard Tantalum, 100 uF, +/- 10%, 16 V, -55 to 125 degC, 2-Pin SMD (2312), RoHS, Tape and Reel", Capacitance=100uF, Case/Package=Molded, Case Code (Imperial)=2412, Case Code (Metric)=6032, ESR (Equivalent Series Resistance)=1Ohm, Leakage Current=16uA, Manufacturer=AVX, Max Operating Temperature=125degC, Min Operating Temperature=-55degC, Package Description="2-Pin Surface Mount Device, Body 6 x 3.25 mm", Package Quantity=1, Package Reference=TAJ-C-2, Tolerance=10%, Voltage Rating=16V, Datasheet URL=http://datasheets.avx.com/TAJ.pdf, Datasheet Version=42401.0, Depth=3.2mm, Dissipation Factor=8%, Height=2.8mm, Height - Seated (Max)=0.11inch, Lead Free=LeadFree, Length=6mm, Manufacturer URL=http://www.avx.com/, Number of Pins=2, Packaging=TapeandReel, Polarity=Polar, Radiation Hardening=No, REACH SVHC=NoSVHC, Resistance=1Ohm, RoHSCompliant=True, Termination=SMD/SMT, Voltage Rating (DC)=16V, Width=3.2mm
C2 C4 C6 C8 C10 C12 C14 C16 C18 C20 C22 C24: library part CMP-2000-06369-1, "Chip Capacitor, 47 uF, +/- 10%, 10 V, -55 to 85 degC, 1812 ( 4532 Metric), RoHS, Tape and Reel", Capacity (elec.)=47µF, Manufacturer=Murata, Nominal voltage=10V, Package Description="2-Pin Surface Mount Device, Body 4.5 x 3.2 mm", Package Reference="1812 (4532 Metric)", Tolerance=15%, Category=Ceramiccapacitor, Content=500pc(s), Datasheet URL=http://media.digikey.com/pdf/Data%20Sheets/Murata%20PDFs/grm43er61a476ke19.pdf, Datasheet Version=07/2006, Industrial packaging=Yes, Manufacturer URL=http://www.murata.com/, Material=Ceramic, Material properties=X5R, Mounting Technology=SurfaceMount, Packaging type=Reel, Type=GRM43ER61A476KE19L
C25 C26 C27 C28 C29 C30 C31 C32: library part CMP-1036-04415-1, "CAP 100nF 25V -20% to +80% 0805 (2012 Metric) Thickness 0.75mm SMD", Case-EIA=0805, Case-Metric=2012, Rated Voltage="25 V", Tolerance="-20% to +80%", Max Thickness="0.75 mm", Technology=SMT
C67_1 C67_2 C67_3 C67_4 C67_5 C67_6 C72_1 C72_2 C72_3 C72_4 C72_5 C72_6 C73_1 C73_2 C73_3 C73_4 C73_5 C73_6 C(Desat)1_1 C(Desat)1_2 C(Desat)1_3 C(Desat)1_4 C(Desat)1_5 C(Desat)1_6: library part CMP-1037-01572-1, "CAP 100pF 50V ±5% 1206 (3216 Metric) Thickness 0.75mm SMD", Case-EIA=1206, Case-Metric=3216, Rated Voltage="50 V", Tolerance=±5%, Max Thickness="0.75 mm", Technology=SMT
C68_1 C68_2 C68_3 C68_4 C68_5 C68_6 C69_1 C69_2 C69_3 C69_4 C69_5 C69_6 C70_1 C70_2 C70_3 C70_4 C70_5 C70_6 C71_1 C71_2 C71_3 C71_4 C71_5 C71_6: library part CMP-1038-02022-1, "CAP 1uF 25V -20% to +80% 1210 (3225 Metric) Thickness 1.7mm SMD", Case-EIA=1210, Case-Metric=3225, Rated Voltage="25 V", Tolerance="-20% to +80%", Max Thickness="1.7 mm", Technology=SMT
D1 D2 D3 D4 D5 D6: library part CMP-2000-05114-1, "Schottky Rectifier, 40 V, 0.5 A, 2-Pin SOD-123, RoHS, Tape and Reel", Capacitance @ Vr, F=-, Current - Average Rectified (Io)=500mA, Current - Reverse Leakage @ Vr=20µA@40V, Manufacturer=Fairchild, Operating Temperature - Junction=-65degC~125degC, Package / Case=SOD-123, Standard Package=1, Voltage - DC Reverse (Vr) (Max)=40V, Voltage - Forward (Vf) (Max) @ If=510mV@500mA, Category=DiscreteSemiconductorProducts, Datasheet URL=https://datasheet.ciiva.com/8303/mbr0540-8303808.pdf, Datasheet Version="Rev. 1.1.0, 10/2014", Diode Type=Schottky, Family=Diodes,Rectifiers-Single, Manufacturer URL=https://www.fairchildsemi.com/, Mounting Type=SurfaceMount, Online Catalog=SchottkyDiode, Other Names=MBR0540CT, Packaging=CutTape(CT), Reverse Recovery Time (trr)=-, Series=-, Speed=FastRecovery=200mA(Io), Supplier Device Package=SOD-123
D25_1 D25_2 D25_3 D25_4 D25_5 D25_6: library part CMP-1183-00004-1, "Medium Power AF Schottky Diode, SOD323, Reel, Green", Manufacturer=Infineon, ComponentLink1Description="Manufacturer URL", ComponentLink1URL=http://www.infineon.com/, ComponentLink2Description=Datasheet, ComponentLink2URL=http://www.infineon.com/dgdl/bat165series.pdf?folderId=db3a304313d846880113def5812204a1&fileId=db3a304313d846880113df01f69804d6, ComponentLink3Description="Package Specification", ComponentLink3URL=http://www.infineon.com/dgdl/SOD323-Package_Overview.pdf?folderId=db3a30431936bc4b011952aab84f3bbe&fileId=db3a30431936bc4b011952beed653be3, Configuration=Single, CT (max)="12 pF", Green=TRUE, IF (max)="750 mA", Mounting Technology="Surface Mount", PackageDescription="2-Pin Small Outline Diode Package, 1.25 x 1.7 mm Body", PackageReference=SOD323, Packing=Reel, PartNumber=BAT165, VF (max)="700 mV", VR (max)="40 V"
D26_1 D26_2 D26_3 D26_4 D26_5 D26_6: library part CMP-2000-07172-1, "Power Schottky Rectifier, 1 A, 60 V, 2-Pin SMD (SMB), RoHS, Tape and Reel", Capacitance @ Vr, F=-, Current - Average Rectified (Io)=1A, Current - Reverse Leakage @ Vr=4µA@60V, Manufacturer=STMicroelectronics, Operating Temperature - Junction=150°C(Max), Package / Case=DO-214AA,SMB, Package Description="2-Pin Surface Mount Device, Body 4.325 x 3.625 mm", Package Reference=SMB_P, Standard Package=1, Supplier Device Package=SMB, Voltage - DC Reverse (Vr) (Max)=60V, Voltage - Forward (Vf) (Max) @ If=670mV@1A, Category=DiscreteSemiconductorProducts, Datasheet URL=http://www.st.com/content/ccc/resource/technical/document/datasheet/93/c1/06/0c/63/7c/41/d5/CD00001023.pdf/files/CD00001023.pdf/jcr:content/translations/en.CD00001023.pdf, Datasheet Version=03/2010, Diode Type=Schottky, Family=Diodes,Rectifiers-Single, Manufacturer URL=http://www.st.com/, Mounting Technology=SurfaceMount, Mounting Type=SurfaceMount, Online Catalog=SchottkyDiode, Other Names=497-7547-6, Other Related Documents=STPS160ViewAllSpecifications, Package URL=http://www.st.com/st-web-ui/static/active/en/resource/technical/document/datasheet/CD00279657.pdf, Packaging=Digi-Reel®, Reverse Recovery Time (trr)=-, Series=-, Speed=FastRecovery=200mA(Io)
D27_1 D27_2 D27_3 D27_4 D27_5 D27_6: library part CMP-2000-06998-1, "Fast Recovery Rectifier, 1 A, 1.3 V, -65 to 150 degC, 2-Pin SMD, RoHS, Tape and Reel", Average Rectified Current-Max=1A, Forward Voltage=1.3V, Manufacturer="Diodes Inc", Package Description="2-Pin Surface Mount Device, Body 4.315 x 3.62 mm", Package Reference=SMB-2, Reverse Current-Max=5µA, Reverse Voltage-Max [Vrrm]=1000V, Datasheet URL=http://www.diodes.com/_files/datasheets/ds15002.pdf, Datasheet Version="Rev. 14-2, 01/2015", Manufacturer URL=http://www.diodes.com/, Mounting Technology=SurfaceMount, Reverse Recovery Time-Max=500ns
D125 D126 D127 D128 D129 D130: library part STTH112U, "No Description Available", Built_By=EMA_UL_Team, Copyright="Copyright (C) 2018 Accelerated Designs. All rights reserved", Manufacturer_Part_Number=STTH112U, RefDes=RefDes, Type=DEV, Vendor=STMicroelectronics
Q1_1 Q1_2 Q1_3 Q1_4 Q1_5 Q1_6: library part CMP-1046-00075-1, "Complementary Silicon Plastic Power Transistor, 3-Pin TO-220, Tube", Manufacturer="On Semiconductor", ComponentLink1Description="Manufacturer URL", ComponentLink1URL=http://www.onsemi.com/, ComponentLink2Description=Datasheet, ComponentLink2URL=http://www.onsemi.cn/pub_link/Collateral/MJE15028-D.PDF, ComponentLink3Description="Package Specification", ComponentLink3URL=http://www.onsemi.com/pub_link/Collateral/221A-09.PDF, DatasheetVersion="Rev. 6", fT Min (MHz)=30, IC Continuous (A)=8, Mounting Technology="Through Hole", PackageDescription="3-Pin Flange Mount, Vertical Straight Lead, Body 9.97 x 4.445 mm, Pitch 2.54 mm", PackageReference=TO-220-3-221A-09, PackageVersion="Rev. AG, 09/2011", Packing=Tube, PartNumber=MJE15030, Polarity=NPN, RoHS=FALSE
Q2_1 Q2_2 Q2_3 Q2_4 Q2_5 Q2_6: library part CMP-1030-00019-1, "Complementary Silicon Plastic Power Transistor, 3-Pin TO-220, Tube", Manufacturer="On Semiconductor", ComponentLink1Description="Manufacturer URL", ComponentLink1URL=http://www.onsemi.com/, ComponentLink2Description=Datasheet, ComponentLink2URL=http://www.onsemi.cn/pub_link/Collateral/MJE15028-D.PDF, ComponentLink3Description="Package Specification", ComponentLink3URL=http://www.onsemi.com/pub_link/Collateral/221A-09.PDF, DatasheetVersion="Rev. 6", fT Min (MHz)=30, IC Continuous (A)=8, Mounting Technology="Through Hole", PackageDescription="3-Pin Flange Mount, Vertical Straight Lead, Body 9.97 x 4.445 mm, Pitch 2.54 mm", PackageReference=TO-220-3-221A-09, PackageVersion="Rev. AG, 09/2011", Packing=Tube, PartNumber=MJE15031, Polarity=PNP, RoHS=FALSE
R43_1 R43_2 R43_3 R43_4 R43_5 R43_6: library part CMP-1018-00074-1, "1K 1W 5% 2512 (6432 Metric)  SMD", Case-EIA=2512, Case-Metric=6432, Power="1 W", Tolerance="5 %", Part=CHV2512-JW-107ELFCT-ND, Technology=SMT
R44_1 R44_2 R44_3 R44_4 R44_5 R44_6 RG1_1 RG1_2 RG1_3 RG1_4 RG1_5 RG1_6 RG2_1 RG2_2 RG2_3 RG2_4 RG2_5 RG2_6: library part CMP-1018-00010-1, "2R2 1W 5% 2512 (6432 Metric)  SMD", Case-EIA=2512, Case-Metric=6432, Power="1 W", Tolerance="5 %", Technology=SMT
R45_1 R45_2 R45_3 R45_4 R45_5 R45_6 R46_1 R46_2 R46_3 R46_4 R46_5 R46_6 R47_1 R47_2 R47_3 R47_4 R47_5 R47_6 R93_1 R93_2 R93_3 R93_4 R93_5 R93_6 R94_1 R94_2 R94_3 R94_4 R94_5 R94_6 R95_1 R95_2 R95_3 R95_4 R95_5 R95_6 R96_1 R96_2 R96_3 R96_4 R96_5 R96_6: library part R-US_R0805, "RESISTOR, American symbol"
RB1_1 RB1_2 RB1_3 RB1_4 RB1_5 RB1_6: library part CMP-1014-00360-1, "47R 0.25W 1% 1206 (3216 Metric)  SMD", Case-EIA=1206, Case-Metric=3216, Power="0.25 W", Tolerance="1 %", Technology=SMT
T1B T1C T1E_T2C T2B T2E T3B T3C T3E_T4C T4B T4E T5B T5C T5E_T6C T6B T6E: "Connector"
TP1 TP2 TP3 TP4 TP5 TP6: "TEST PIN"
U1 U2: library part CMP-0859-00675-3, "Low-Power Triple Buffer Gate, DCU0008A, LARGE T&R", F @ Nom Voltage(Max)(Mhz)=100, Generic Part Number=SN74AUP3G34, ICC @ Nom Voltage(Max)(mA)=0.0009, Manufacturer="Texas Instruments", Operating Temperature Range(C)="-40 to 85", Rating=Catalog, tpd @ Nom Voltage(Max)(ns)=32.8,20.9,14.2,11,7.6,6.2, Voltage(Nom)(V)=0.8,1.2,1.5,1.8,2.5,3.3, 3-State Output=No, Bits(#)=3, DatasheetVersion=SCES766C, Input Type=CMOS, Logic=True, Output Drive (IOL/IOH)(Max)(mA)=20/-20, Output Type=CMOS, PackageReference=DCU0008A, PartId=1, Schmitt Trigger=No, Sub-Family="Non-Inverting Buffer/Driver", Technology Family=AUP, VCC(Max)(V)=3.6, VCC(Min)(V)=0.8
U20_1 U20_2 U20_3 U20_4 U20_5 U20_6: library part 1ED020I12B2XUMA1, "No Description Available", Built_By=EMA_UL_Team, Copyright="Copyright (C) 2018 Accelerated Designs. All rights reserved", Manufacturer_Part_Number=1ED020I12B2XUMA1, RefDes=RefDes, Type=DEV, Vendor=Infineon
U25_1 U25_2 U25_3 U25_4 U25_5 U25_6: library part CMP-0859-00371-3, "Single Power Supply BUFFER Logic Level Shifter (no enable), DCK0005A, LARGE T&R", F @ Nom Voltage(Max)(Mhz)=50, Generic Part Number=SN74LV1T34, ICC @ Nom Voltage(Max)(mA)=0.01, Manufacturer="Texas Instruments", Operating Temperature Range(C)="-40 to 125", Rating=Catalog, tpd @ Nom Voltage(Max)(ns)=14.5,9.5,8.0,6.5, Voltage(Nom)(V)=1.8,2.5,3.3,5.5, 3-State Output=Yes, Bits(#)=1, DatasheetVersion=SCLS743A, Input Type=TTL, Logic=True, Output Drive (IOL/IOH)(Max)(mA)=8/-8, Output Type=CMOS, PackageReference=DCK0005A, PartId=1, Schmitt Trigger=No, Special Features="1.8V to 3.3V Up Translation,3.3V to 1.8V Down Translation,5V Input Tolerant", Sub-Family="Non-Inverting Buffer/Driver", Technology Family=LV1T, VCC(Max)(V)=5.5, VCC(Min)(V)=1.6

## Free pads (board coordinates)
  round 7 hole 4: 4(28.3,120) 4(28.5,26.9) 4(93.3,120) 4(152.6,120) 5(222.6,120) 5(222.8,26.9)

## Via types
v1: diameter 1.27, hole 0.711, Top Layer to Bottom Layer, 154 vias
v2: diameter 2, hole 1, Top Layer to Bottom Layer, 11 vias

## Nets (pads, with @x,y where several pads share a name; then routed paths per layer and width w, separated by ;. In a path a pad name is that pad's centre, name@x,y a point inside that pad or via, vN(x,y) a via of type N, cw(c..) or ccw(c..) an arc to the next point about the centre after c; other vN are vias at no path point)
+5V: C28.1 C32.1 C73_1.1 C73_2.1 C73_3.1 C73_4.1 C73_5.1 C73_6.1 R44_1.1 R44_2.1 R44_3.1 R44_4.1 R44_5.1 R44_6.1 R45_1.2 R45_2.2 R45_3.2 R45_4.2 R45_5.2 R45_6.2 R46_1.2 R46_2.2 R46_3.2 R46_4.2 R46_5.2 R46_6.2 U1.8 U2.8 U25_1.5 U25_2.5 U25_3.5 U25_4.5 U25_5.5 U25_6.5 X1.9 X1.13 | length 79.3
  Top Layer w0.381: U1.8@55.55,108.2 55.55,107.85 55.7,107.7 57.1,107.7 ; C28.1@57.4,108.9 57.4,108 57.1,107.7 ; v1(57.5,106.5) 57.1,106.9 57.1,107.7 ; v1(176.4,115.3) 176.6,115.5 C32.1@178.5,115.5 178.5,116.7 178.9,117.1 180.35,117.1 U2.8@181.15,116.3
  Top Layer w0.762: U25_2.5@37.95,98.025 38.425,97.55 40.2,97.55 v1(40.2,95.85) ; U25_1.5@72.05,98.275 72.525,97.8 C73_1.1@74.3,97.8 v1(74.3,96.1) ; U25_4.5@105.45,98.275 105.925,97.8 C73_4.1@107.7,97.8 v1(107.7,96.1) ; U25_3.5@138.85,98.275 139.325,97.8 C73_3.1@141.1,97.8 v1(141.1,96.1) ; U25_6.5@172.25,98.175 172.725,97.7 C73_6.1@174.5,97.7 v1(174.5,96) ; U25_5.5@205.75,98.075 206.225,97.6 C73_5.1@208,97.6 v1(208,95.9)
  Top Layer w1.27: R45_2.2@28.6,96.25 v1(28.6,98.45) ; R46_2.2@34.8,96.25 v1(34.8,98.15) ; R45_1.2@62.7,96.5 v1(62.7,98.7) ; R46_1.2@68.9,96.5 v1(68.9,98.4) ; R45_4.2@96.1,96.5 v1(96.1,98.7) ; R46_4.2@102.3,96.5 v1(102.3,98.4) ; R45_3.2@129.5,96.5 v1(129.5,98.7) ; R46_3.2@135.7,96.5 v1(135.7,98.4) ; R45_6.2@162.9,96.4 v1(162.9,98.6) ; R46_6.2@169.1,96.4 v1(169.1,98.3) ; R45_5.2@196.4,96.3 v1(196.4,98.5) ; R46_5.2@202.6,96.3 v1(202.6,98.2)
  Bottom Layer w1.27: R44_2.1@27.6,101.15 27.6,99.45 v1(28.6,98.45) ; R44_1.1@61.7,101.4 61.7,99.7 v1(62.7,98.7) ; R44_4.1@95.1,101.4 95.1,99.7 v1(96.1,98.7) ; R44_3.1@128.5,101.4 128.5,99.7 v1(129.5,98.7) ; R44_6.1@161.9,101.3 161.9,99.6 v1(162.9,98.6) ; R44_5.1@195.4,101.2 195.4,99.5 v1(196.4,98.5)
+12V: PM1.2 PM2.2 PM3.2 PM4.2 PM5.2 PM6.2 X1.1 X1.5 | length 8.5
  Top Layer w1.27: X1.1@107.3,120.1 106.7,119.5 106.7,115.1 v1(109,112.8)
+15VT1: C1.1 C2.2 C68_1.2 C69_1.2 D26_1.2 PM1.3 Q1_1.2 U20_1.5 | length 28.7
  Top Layer w0.508: C68_1.2@60.2,69.2 C69_1.2@60.2,72.4 ; v1@60.2,75.8 60.5,76.1 v1(60.5,76.3)
  Top Layer w1: C69_1.2@60.2,72.4 v1@60.2,75.8 ; v1(65.1,76.9) 65.84,77.64 U20_1.5@65.84,80.102
  Top Layer w2: D26_1.2@77.81,33.2 v2(80.6,33.2) ; Q1_1.2@85.5,45.2 85.575,45.275 C1.1@85.575,60.3
+15VT2: C5.1 C6.2 C68_2.2 C69_2.2 D26_2.2 PM2.3 Q1_2.2 U20_2.5 | length 30
  Top Layer w0.508: C68_2.2@26.1,68.95 C69_2.2@26.1,72.15 ; 26.1,75.55 v1@26.1,75.8
  Top Layer w1: C69_2.2@26.1,72.15 26.1,75.55 ; v1@26.1,75.8 v1(26.5,76.2) ; v1(31,76.65) 31.74,77.39 U20_2.5@31.74,79.852 ; C6.2@52.275,55.1 C6.2@52.475,55.3
  Top Layer w1.27: v1(34.9,34.2) 36.2,34.2 37.2,33.2 D26_2.2@37.8,33.2
  Top Layer w2: Q1_2.2@51.4,44.95 51.4,49.6 52.275,50.475 C6.2@52.275,55.1 ; C6.2@52.475,55.3 C5.1@52.475,60.3
+15VT3: C9.1 C10.2 C68_3.2 C69_3.2 D26_3.2 PM3.3 Q1_3.2 U20_3.5 | length 25.5
  Top Layer w0.508: C68_3.2@127,69.2 C69_3.2@127,72.4 ; v1@127,75.8 127.3,76.1 v1(127.3,76.2)
  Top Layer w1: C69_3.2@127,72.4 v1@127,75.8 ; v1(131.9,76.9) 132.64,77.64 U20_3.5@132.64,80.102
  Top Layer w2: Q1_3.2@152.3,45.2 C9.1@152.3,60.025
  other v2: 144.61,33.2
+15VT4: C13.1 C14.2 C68_4.2 C69_4.2 D26_4.2 PM4.3 Q1_4.2 U20_4.5 | length 25.6
  Top Layer w0.508: C68_4.2@93.6,69.2 C69_4.2@93.6,72.4 ; v1@93.6,75.8 v1(93.9,76.1)
  Top Layer w1: C69_4.2@93.6,72.4 v1@93.6,75.8 ; v1(98.5,76.9) 99.24,77.64 U20_4.5@99.24,80.102
  Top Layer w2: C13.1@118.875,60.3 118.875,45.225 Q1_4.2@118.9,45.2
  other v2: 111.21,33.2
+15VT5: C17.1 C18.2 C68_5.2 C69_5.2 D26_5.2 PM5.3 Q1_5.2 U20_5.5 | length 27.1
  Top Layer w0.508: C68_5.2@193.9,69 C69_5.2@193.9,72.2 ; v1@193.9,75.6 194.2,75.9 v1(194.2,76.1)
  Top Layer w1: C69_5.2@193.9,72.2 v1@193.9,75.6 ; v1(198.8,76.7) 199.54,77.44 U20_5.5@199.54,79.902
  Top Layer w2: Q1_5.2@219.2,45 219.2,48.2 222.35,51.35 C17.1@222.35,60.1
  other v2: 211.51,33
+15VT6: C21.1 C22.2 C68_6.2 C69_6.2 D26_6.2 PM6.3 Q1_6.2 U20_6.5 | length 26.5
  Top Layer w0.508: C68_6.2@160.4,69.1 C69_6.2@160.4,72.3 ; v1@160.4,75.7 160.7,76 v1(160.7,76.2)
  Top Layer w1: C69_6.2@160.4,72.3 v1@160.4,75.7 ; v1(165.3,76.8) 166.04,77.54 U20_6.5@166.04,80.002
  Top Layer w2: Q1_6.2@185.7,45.1 185.7,59.525 185.8,59.625 C21.1@185.8,60.8
  other v2: 178.01,33.1
-8.5VT1: C3.2 C4.1 C70_1.1 C71_1.1 PM1.4 Q2_1.2 U20_1.1 U20_1.8 | length 46.1
  Top Layer w1: U20_1.1@60.76,80.102 60.76,81.66 61.3,82.2 69.1,82.2 69.65,81.65 U20_1.8@69.65,80.102 69.65,76.45 68.6,75.4 C71_1.1@68.6,72.4 C70_1.1@68.6,69.2 68.6,64.8 v1(67.8,64)
  Top Layer w2: Q2_1.2@66.2,45.2 66.2,47.5 70.225,51.525 C3.2@70.225,60.3
-8.5VT2: C7.2 C8.1 C70_2.1 C71_2.1 PM2.4 Q2_2.2 U20_2.1 U20_2.8 | length 47.3
  Top Layer w1: U20_2.1@26.66,79.852 26.66,81.41 27.2,81.95 35,81.95 35.55,81.4 U20_2.8@35.55,79.852 35.55,76.2 34.5,75.15 C71_2.1@34.5,72.15 C70_2.1@34.5,68.95 34.5,64.55 v1(33.7,63.75)
  Top Layer w1.27: C7.2@37.2,60.175 C7.2@37.325,60.3
  Top Layer w2: Q2_2.2@32.1,44.95 32.1,48.3 37.825,54.025 C8.1@37.825,55.2 37.2,55.825 C7.2@37.2,60.175
-8.5VT3: C11.2 C12.1 C70_3.1 C71_3.1 PM3.4 Q2_3.2 U20_3.1 U20_3.8 | length 46.5
  Top Layer w1: U20_3.1@127.56,80.102 127.56,81.66 128.1,82.2 135.9,82.2 136.45,81.65 U20_3.8@136.45,80.102 136.45,76.45 135.4,75.4 C71_3.1@135.4,72.4 C70_3.1@135.4,69.2 135.4,64.8 v1(134.6,64)
  Top Layer w2: Q2_3.2@133,45.2 133,48.6 137.425,53.025 C11.2@137.425,60.6
-8.5VT4: C15.2 C16.1 C70_4.1 C71_4.1 PM4.4 Q2_4.2 U20_4.1 U20_4.8 | length 46.2
  Top Layer w1: U20_4.1@94.16,80.102 94.16,81.66 94.7,82.2 102.5,82.2 103.05,81.65 U20_4.8@103.05,80.102 103.05,76.45 102,75.4 C71_4.1@102,72.4 C70_4.1@102,69.2 102,64.8 v1(101.2,64)
  Top Layer w2: Q2_4.2@99.6,45.2 99.6,48.9 103.95,53.25 C15.2@103.95,60.3
-8.5VT5: C19.2 C20.1 C70_5.1 C71_5.1 PM5.4 Q2_5.2 U20_5.1 U20_5.8 | length 47
  Top Layer w1: U20_5.1@194.46,79.902 194.46,81.46 195,82 202.8,82 203.35,81.45 U20_5.8@203.35,79.902 203.35,76.25 202.3,75.2 C71_5.1@202.3,72.2 C70_5.1@202.3,69 202.3,64.6 v1(201.5,63.8)
  Top Layer w2: Q2_5.2@199.9,45 199.9,48.7 206.125,54.925 C19.2@206.125,60.1
-8.5VT6: C23.2 C24.1 C70_6.1 C71_6.1 PM6.4 Q2_6.2 U20_6.1 U20_6.8 | length 46.4
  Top Layer w1: U20_6.1@160.96,80.002 160.96,81.56 161.5,82.1 169.3,82.1 169.85,81.55 U20_6.8@169.85,80.002 169.85,76.35 168.8,75.3 C71_6.1@168.8,72.3 C70_6.1@168.8,69.1 168.8,64.7 v1(168,63.9)
  Top Layer w2: Q2_6.2@166.4,45.1 166.4,47.9 170.325,51.825 C23.2@170.325,60.6
COMMON1: C1.2 C2.1 C3.1 C4.2 C68_1.1 C69_1.1 C70_1.2 C71_1.2 C(Desat)1_1.1 D25_1.2 D126.1 PM1.6 T1E_T2C.1 U20_1.3 | length 62.3
  Top Layer w0.5: C69_1.1@63.3,72.5 U20_1.3@63.3,80.102
  Top Layer w1.016: v1(64.3,66.7) 64.3,69.2 ; D25_1.2@75.35,46.5 75.35,46.85 75.6,47.1 75.6,49.2 76.6,50.2 v1(77.7,50.2) ; 64.3,69.2 C70_1.2@65.6,69.2 C71_1.2@65.6,72.4 C69_1.1@63.2,72.4 C68_1.1@63.2,69.2 64.3,69.2
  Top Layer w1.27: C69_1.1@63.2,72.4 C69_1.1@63.3,72.5
  Top Layer w2: D126.1@55.5,33.4 65.2,33.4 65.8,34 v2(65.9,34) 65.9,26 T1E_T2C.1@66,25.9 ; C4.2@75.075,55 77.8,55 ; C3.1@75.175,60.3 77.9,60.3 ; C1.2@80.625,60.3 77.9,60.3 ; C2.1@81.025,55 77.8,55 ; 77.8,55 77.9,55.1 77.9,60.3
  other v1: 77.9,57.6
COMMON2: C5.2 C6.1 C7.1 C8.2 C68_2.1 C69_2.1 C70_2.2 C71_2.2 C(Desat)1_2.1 D25_2.2 PM2.6 T2E.1 U20_2.3 | length 53.2
  Top Layer w0.5: C69_2.1@29.2,72.25 U20_2.3@29.2,79.852
  Top Layer w1.016: v1(30.2,66.45) 30.2,68.95 ; D25_2.2@41.25,46.25 41.25,46.6 41.5,46.85 41.5,48.95 42.5,49.95 v1(43.6,49.95) ; 30.2,68.95 C70_2.2@31.5,68.95 C71_2.2@31.5,72.15 C69_2.1@29.1,72.15 C68_2.1@29.1,68.95 30.2,68.95
  Top Layer w1.27: C69_2.1@29.1,72.15 C69_2.1@29.2,72.25 ; C6.1@47.825,55.2 C6.1@47.925,55.1 ; T2E.1@51,25.9 T2E.1@51,27.7
  Top Layer w2: C8.2@42.175,55.2 45.1,55.2 ; C7.1@42.275,60.3 44.9,60.3 ; v2(46.4,34.2) 46.4,32.3 T2E.1@51,27.7 ; C5.2@47.525,60.3 44.9,60.3 ; C6.1@47.825,55.2 45.1,55.2 ; 44.9,60.3 44.9,55.4 45.1,55.2
  other v1: 44.9,57.75
COMMON3: C9.2 C10.1 C11.1 C12.2 C68_3.1 C69_3.1 C70_3.2 C71_3.2 C(Desat)1_3.1 D25_3.2 D128.1 PM3.6 T3E_T4C.1 U20_3.3 | length 63
  Top Layer w0.5: C69_3.1@130.1,72.5 U20_3.3@130.1,80.102
  Top Layer w1.016: v1(131.1,66.7) 131.1,69.2 ; D25_3.2@142.15,46.5 142.15,46.85 142.4,47.1 142.4,49.2 143.4,50.2 v1(144.5,50.2) ; 131.1,69.2 C70_3.2@132.4,69.2 C71_3.2@132.4,72.4 C69_3.1@130,72.4 C68_3.1@130,69.2 131.1,69.2
  Top Layer w1.27: C69_3.1@130,72.4 C69_3.1@130.1,72.5
  Top Layer w2: D128.1@121.794,33.7 132.4,33.7 v2(132.8,34.1) T3E_T4C.1@132.8,25.9 ; C12.2@141.875,55.1 144.9,55.1 ; C11.1@142.375,60.6 144.8,60.6 ; C9.2@147.225,60.6 144.8,60.6 ; C10.1@148.325,55 148.225,55.1 144.9,55.1 ; 144.8,60.6 144.8,55.2 144.9,55.1
  other v1: 144.8,57.8
COMMON4: C13.2 C14.1 C15.1 C16.2 C68_4.1 C69_4.1 C70_4.2 C71_4.2 C(Desat)1_4.1 D25_4.2 PM4.6 T4E.1 U20_4.3 | length 53
  Top Layer w0.5: C69_4.1@96.7,72.5 U20_4.3@96.7,80.102
  Top Layer w1.016: v1(97.7,66.7) 97.7,69.2 ; D25_4.2@108.75,46.5 108.75,46.85 109,47.1 109,49.2 110,50.2 v1(111.1,50.2) ; 97.7,69.2 C70_4.2@99,69.2 C71_4.2@99,72.4 C69_4.1@96.6,72.4 C68_4.1@96.6,69.2 97.7,69.2
  Top Layer w1.27: C69_4.1@96.6,72.4 C69_4.1@96.7,72.5 ; T4E.1@117.8,25.9 T4E.1@117.8,27.8
  Top Layer w2: C16.2@108.675,55 111.4,55 ; C15.1@108.9,60.3 111.5,60.3 ; C13.2@113.925,60.3 111.5,60.3 ; v2(114.4,34.4) 114.4,31.2 T4E.1@117.8,27.8 ; C14.1@114.625,55 111.4,55 ; 111.4,55 111.5,55.1 111.5,60.3
  other v1: 111.5,57.6
COMMON5: C17.2 C18.1 C19.1 C20.2 C68_5.1 C69_5.1 C70_5.2 C71_5.2 C(Desat)1_5.1 D25_5.2 D130.1 PM5.6 T5E_T6C.1 U20_5.3 | length 65.8
  Top Layer w0.5: C69_5.1@197,72.3 U20_5.3@197,79.902
  Top Layer w1.016: v1(198,66.5) 198,69 ; D25_5.2@209.05,46.3 209.05,46.65 209.3,46.9 209.3,49 210.3,50 v1(211.4,50) ; 198,69 C70_5.2@199.3,69 C71_5.2@199.3,72.2 C69_5.1@196.9,72.2 C68_5.1@196.9,69 198,69
  Top Layer w1.27: C69_5.1@196.9,72.2 C69_5.1@197,72.3
  Top Layer w2: D130.1@188.694,33.5 198.8,33.5 v2(199.5,34.2) T5E_T6C.1@199.5,25.9 ; C20.2@210.675,54.3 214.2,54.3 ; C19.1@211.075,60.1 214.1,60.1 ; C17.2@217.4,60.1 214.1,60.1 ; C18.1@218.125,54.3 214.2,54.3 ; 214.1,60.1 214.1,54.4 214.2,54.3
  other v1: 214.1,57.4
COMMON6: C21.2 C22.1 C23.1 C24.2 C68_6.1 C69_6.1 C70_6.2 C71_6.2 C(Desat)1_6.1 D25_6.2 PM6.6 T6E.1 U20_6.3 | length 52.9
  Top Layer w0.5: C69_6.1@163.5,72.4 U20_6.3@163.5,80.002
  Top Layer w1.016: v1(164.5,66.6) 164.5,69.1 ; D25_6.2@175.55,46.4 175.55,46.75 175.8,47 175.8,49.1 176.8,50.1 v1(177.9,50.1) ; 164.5,69.1 C70_6.2@165.8,69.1 C71_6.2@165.8,72.3 C69_6.1@163.4,72.3 C68_6.1@163.4,69.1 164.5,69.1
  Top Layer w1.27: C69_6.1@163.4,72.3 C69_6.1@163.5,72.4 ; T6E.1@184.5,25.9 T6E.1@184.5,28.3
  Top Layer w2: C23.1@175.275,60.6 178.1,60.6 ; C24.2@175.475,55 178.1,55 ; C21.2@180.725,60.7 180.625,60.6 178.1,60.6 ; C22.1@181.125,55.1 181.025,55 178.1,55 ; v2(181.2,33.9) 181.2,31.6 T6E.1@184.5,28.3 ; 178.1,55 178.1,60.6
  other v1: 178.1,57.9
GND: C28.2 C32.2 C67_1.1 C67_2.1 C67_3.1 C67_4.1 C67_5.1 C67_6.1 C72_1.1 C72_2.1 C72_3.1 C72_4.1 C72_5.1 C72_6.1 C73_1.2 C73_2.2 C73_3.2 C73_4.2 C73_5.2 C73_6.2 D1.1 D2.1 D3.1 D4.1 D5.1 D6.1 PM1.7 PM1.8 PM2.7 PM2.8 PM3.7 PM3.8 PM4.7 PM4.8 PM5.7 PM5.8 PM6.7 PM6.8 R95_1.2 R95_2.2 R95_3.2 R95_4.2 R95_5.2 R95_6.2 R96_1.2 R96_2.2 R96_3.2 R96_4.2 R96_5.2 R96_6.2 U1.4 U2.4 U20_1.9 U20_1.11 U20_1.16 U20_2.9 U20_2.11 U20_2.16 U20_3.9 U20_3.11 U20_3.16 U20_4.9 U20_4.11 U20_4.16 U20_5.9 U20_5.11 U20_5.16 U20_6.9 U20_6.11 U20_6.16 U25_1.3 U25_2.3 U25_3.3 U25_4.3 U25_5.3 U25_6.3 X1.2 X1.6 X1.10 | length 168.3
  Top Layer w0.381: U25_2.3@36.65,100.075 v1@36.65,102.5 ; C73_2.2@40.2,100.35 v1(40.2,103.35) ; D2.1@51.8,106.065 D2.1@52,105.865 ; v1(52.9,111.3) 52.9,111.6 53,111.7 53.7,111.7 54.05,111.35 U1.4@54.05,111.2 ; C28.2@57.4,110.5 58.2,111.3 v1(60.8,111.3) ; U25_1.3@70.75,100.325 v1@70.75,102.75 ; C73_1.2@74.3,100.6 v1(74.3,102.8) ; PM1.8@86.7,102.7 PM1.8@86.74,102.66 ; U25_4.3@104.15,100.325 v1@104.15,102.75 ; C73_4.2@107.7,100.6 v1(107.7,103.6) ; U25_3.3@137.55,100.325 v1@137.55,102.75 ; C73_3.2@141.1,100.6 v1(141.1,103.6) ; U25_6.3@170.95,100.225 v1@170.95,102.65 ; C73_6.2@174.5,100.5 v1(174.5,103.5) ; U2.4@182.65,113.3 182.65,112.75 183.1,112.3 v1(185.3,112.3) ; U25_5.3@204.45,100.125 v1@204.45,102.55 ; C73_5.2@208,100.4 v1(208,103.4) ; PM5.8@220.14,102.84 220.14,106.005 D5.1@220.5,106.365
  Top Layer w0.508: v1(26.4,91.15) 26.66,90.89 U20_2.16@26.66,89.25 ; C72_2.1@26.7,109.65 v1(26.7,112.75) ; v1(31.7,105.55) 31.7,103.45 R95_2.2@32.75,103.45 ; U20_2.11@33.01,89.25 33.01,92.36 v1(33.6,92.95) ; U20_2.9@35.55,89.25 35.55,90.8 35.9,91.15 v1(36.9,91.15) ; v1@36.65,102.5 36.65,102.85 v1(36.7,102.9) ; v1(60.5,91.4) 60.76,91.14 U20_1.16@60.76,89.5 ; C72_1.1@60.7,109.8 C72_1.1@60.8,109.9 v1(60.8,111.3) ; v1(65.8,105.8) 65.8,103.7 R95_1.2@66.85,103.7 ; U20_1.11@67.11,89.5 67.11,92.61 v1(67.7,93.2) ; U20_1.9@69.65,89.5 69.65,91.05 70,91.4 v1(71,91.4) ; v1(70.7,103.1) 70.75,103.05 v1@70.75,102.75 ; v1(92,109.8) 94.1,109.8 C72_4.1@94.2,109.9 ; v1(93.9,91.4) 94.16,91.14 U20_4.16@94.16,89.5 ; v1(99.2,105.8) 99.2,103.7 R95_4.2@100.25,103.7 ; U20_4.11@100.51,89.5 100.51,92.61 v1(101.1,93.2) ; U20_4.9@103.05,89.5 103.05,91.05 103.4,91.4 v1(104.4,91.4) ; v1@104.15,102.75 104.15,103.05 v1(104.3,103.2) ; v1(127.3,91.4) 127.56,91.14 U20_3.16@127.56,89.5 ; C72_3.1@127.6,109 v1(127.6,113) ; v1(132.6,105.8) 132.6,103.7 R95_3.2@133.65,103.7 ; U20_3.11@133.91,89.5 133.91,92.61 v1(134.5,93.2) ; U20_3.9@136.45,89.5 136.45,91.05 136.8,91.4 v1(137.8,91.4) ; v1(137.5,103.2) 137.55,103.15 v1@137.55,102.75 ; v1(158.3,109.8) C72_6.1@161,109.8 ; v1(160.7,91.3) 160.96,91.04 U20_6.16@160.96,89.4 ; v1(166,105.7) 166,103.6 R95_6.2@167.05,103.6 ; U20_6.11@167.31,89.4 167.31,92.51 v1(167.9,93.1) ; U20_6.9@169.85,89.4 169.85,90.95 170.2,91.3 v1(171.2,91.3) ; v1(170.9,102.9) 170.95,102.85 v1@170.95,102.65 ; v1(191.5,109.7) C72_5.1@194.5,109.7 ; v1(194.2,91.2) 194.46,90.94 U20_5.16@194.46,89.3 ; v1(199.5,105.6) 199.5,103.5 R95_5.2@200.55,103.5 ; U20_5.11@200.81,89.3 200.81,92.41 v1(201.4,93) ; U20_5.9@203.35,89.3 203.35,90.85 203.7,91.2 v1(204.7,91.2) ; v1@204.45,102.55 204.45,102.85 v1(204.6,103)
  Top Layer w1: PM2.8@52,102.74 D2.1@52,105.865 ; PM1.8@86.7,102.7 D1.1@86.7,105.565
  Top Layer w1.016: D4.1@119,105.63 119.94,104.69 PM4.8@119.94,102.54 ; PM3.8@153.34,102.74 153.34,105.905 D3.1@153.6,106.165 ; v1(178.5,112.3) C32.2@178.5,113.9 ; PM6.8@186.64,102.84 187.6,103.8 D6.1@187.6,106.065
  Bottom Layer w0.508: v1@33.3,93.25 v1(33.6,92.95) ; v1@67.4,93.5 v1(67.7,93.2) ; v1@100.8,93.5 v1(101.1,93.2) ; v1@134.2,93.5 v1(134.5,93.2) ; v1@167.6,93.4 v1(167.9,93.1) ; v1@201.1,93.3 v1(201.4,93)
  Bottom Layer w0.762: v1@33.3,93.25 C67_2.1@33.3,95.05 ; v1@67.4,93.5 C67_1.1@67.4,95.3 ; v1@100.8,93.5 C67_4.1@100.8,95.3 ; v1@134.2,93.5 C67_3.1@134.2,95.3 ; v1@167.6,93.4 C67_6.1@167.6,95.2 ; v1@201.1,93.3 C67_5.1@201.1,95.1
IGBT1_C: D125.1 T1C.1 | length 9.9
  Top Layer w0.254: 84,26 T1C.1@85.7,26 ; T1C.1@86.9,26.1 T1C.1@88.494,27.694
  Top Layer w2: T1C.1@88.494,27.694 D125.1@88.494,33.6
IGBT1_G: D26_1.1 D27_1.1 RG2_1.2 T1B.1 | length 17.6
  Top Layer w1.27: RG2_1.2@68.8,38.1 D27_1.1@73.45,38.1 73.59,37.96 D26_1.1@73.59,33.2
  Top Layer w2: T1B.1@72,25.9 72,31.61 D26_1.1@73.59,33.2
IGBT2_G: D26_2.1 D27_2.1 RG2_2.2 T2B.1 | length 19.9
  Top Layer w2: RG2_2.2@34.7,37.85 34.75,37.8 D27_2.1@41.05,37.8 41.05,35.76 42.21,34.6 D26_2.1@42.21,33.3 42.21,32.09 45,29.3 T2B.1@45,25.9
IGBT3_C: D127.1 T3C.1 | length 8.4
  Top Layer w2: T3C.1@154.5,25.8 154.1,26.2 154.5,26.6 154.5,27.7 155.194,28.394 D127.1@155.194,33.6
IGBT3_G: D26_3.1 D27_3.1 RG2_3.2 T3B.1 | length 17.6
  Top Layer w1.27: RG2_3.2@135.6,38.1 D27_3.1@140.25,38.1 140.39,37.96 D26_3.1@140.39,33.2
  Top Layer w2: T3B.1@138.8,25.9 138.8,31.61 D26_3.1@140.39,33.2
IGBT4_G: D26_4.1 D27_4.1 RG2_4.2 T4B.1 | length 20.4
  Top Layer w1.27: RG2_4.2@102.2,38.1 D27_4.1@106.85,38.1 106.99,37.96 D26_4.1@106.99,33.2 106.99,31.51 ; T4B.1@111.8,25.9 111.8,29.2
  Top Layer w2: 106.99,31.51 108.9,29.6 111.4,29.6 111.8,29.2
IGBT5_C: D129.1 T5C.1 | length 9.2
  Top Layer w1: T5C.1@213.2,25.9 T5C.1@213.2,28.7
  Top Layer w2: T5C.1@213.2,28.7 217.406,32.906 D129.1@217.406,33.4
IGBT5_G: D26_5.1 D27_5.1 RG2_5.2 T5B.1 | length 17.4
  Top Layer w1.27: D27_5.1@207.15,37.9 D27_5.1@207.29,37.76
  Top Layer w2: RG2_5.2@202.5,37.9 D27_5.1@207.15,37.9 ; T5B.1@205.5,25.9 205.5,31.21 D26_5.1@207.29,33 D27_5.1@207.29,37.76
IGBT6_G: D26_6.1 D27_6.1 RG2_6.2 T6B.1 | length 18.8
  Top Layer w1.27: D27_6.1@173.65,38 D27_6.1@173.79,37.86 ; T6B.1@178.5,25.9 T6B.1@178.5,26.6